# Altium PCB mppt.PcbDoc (part 1 of 6)
Units mm, origin at the board's own origin, x right, y up, seen from the top; angles counter-clockwise.
Board outline 161 x 166 mm, 6 copper layers (Top Layer, Layer 1, Layer 2, Layer 3, Layer 4, Bottom Layer), stack 0.815 mm thick; 460 components, 230 nets, 1421 pads, 2551 vias.
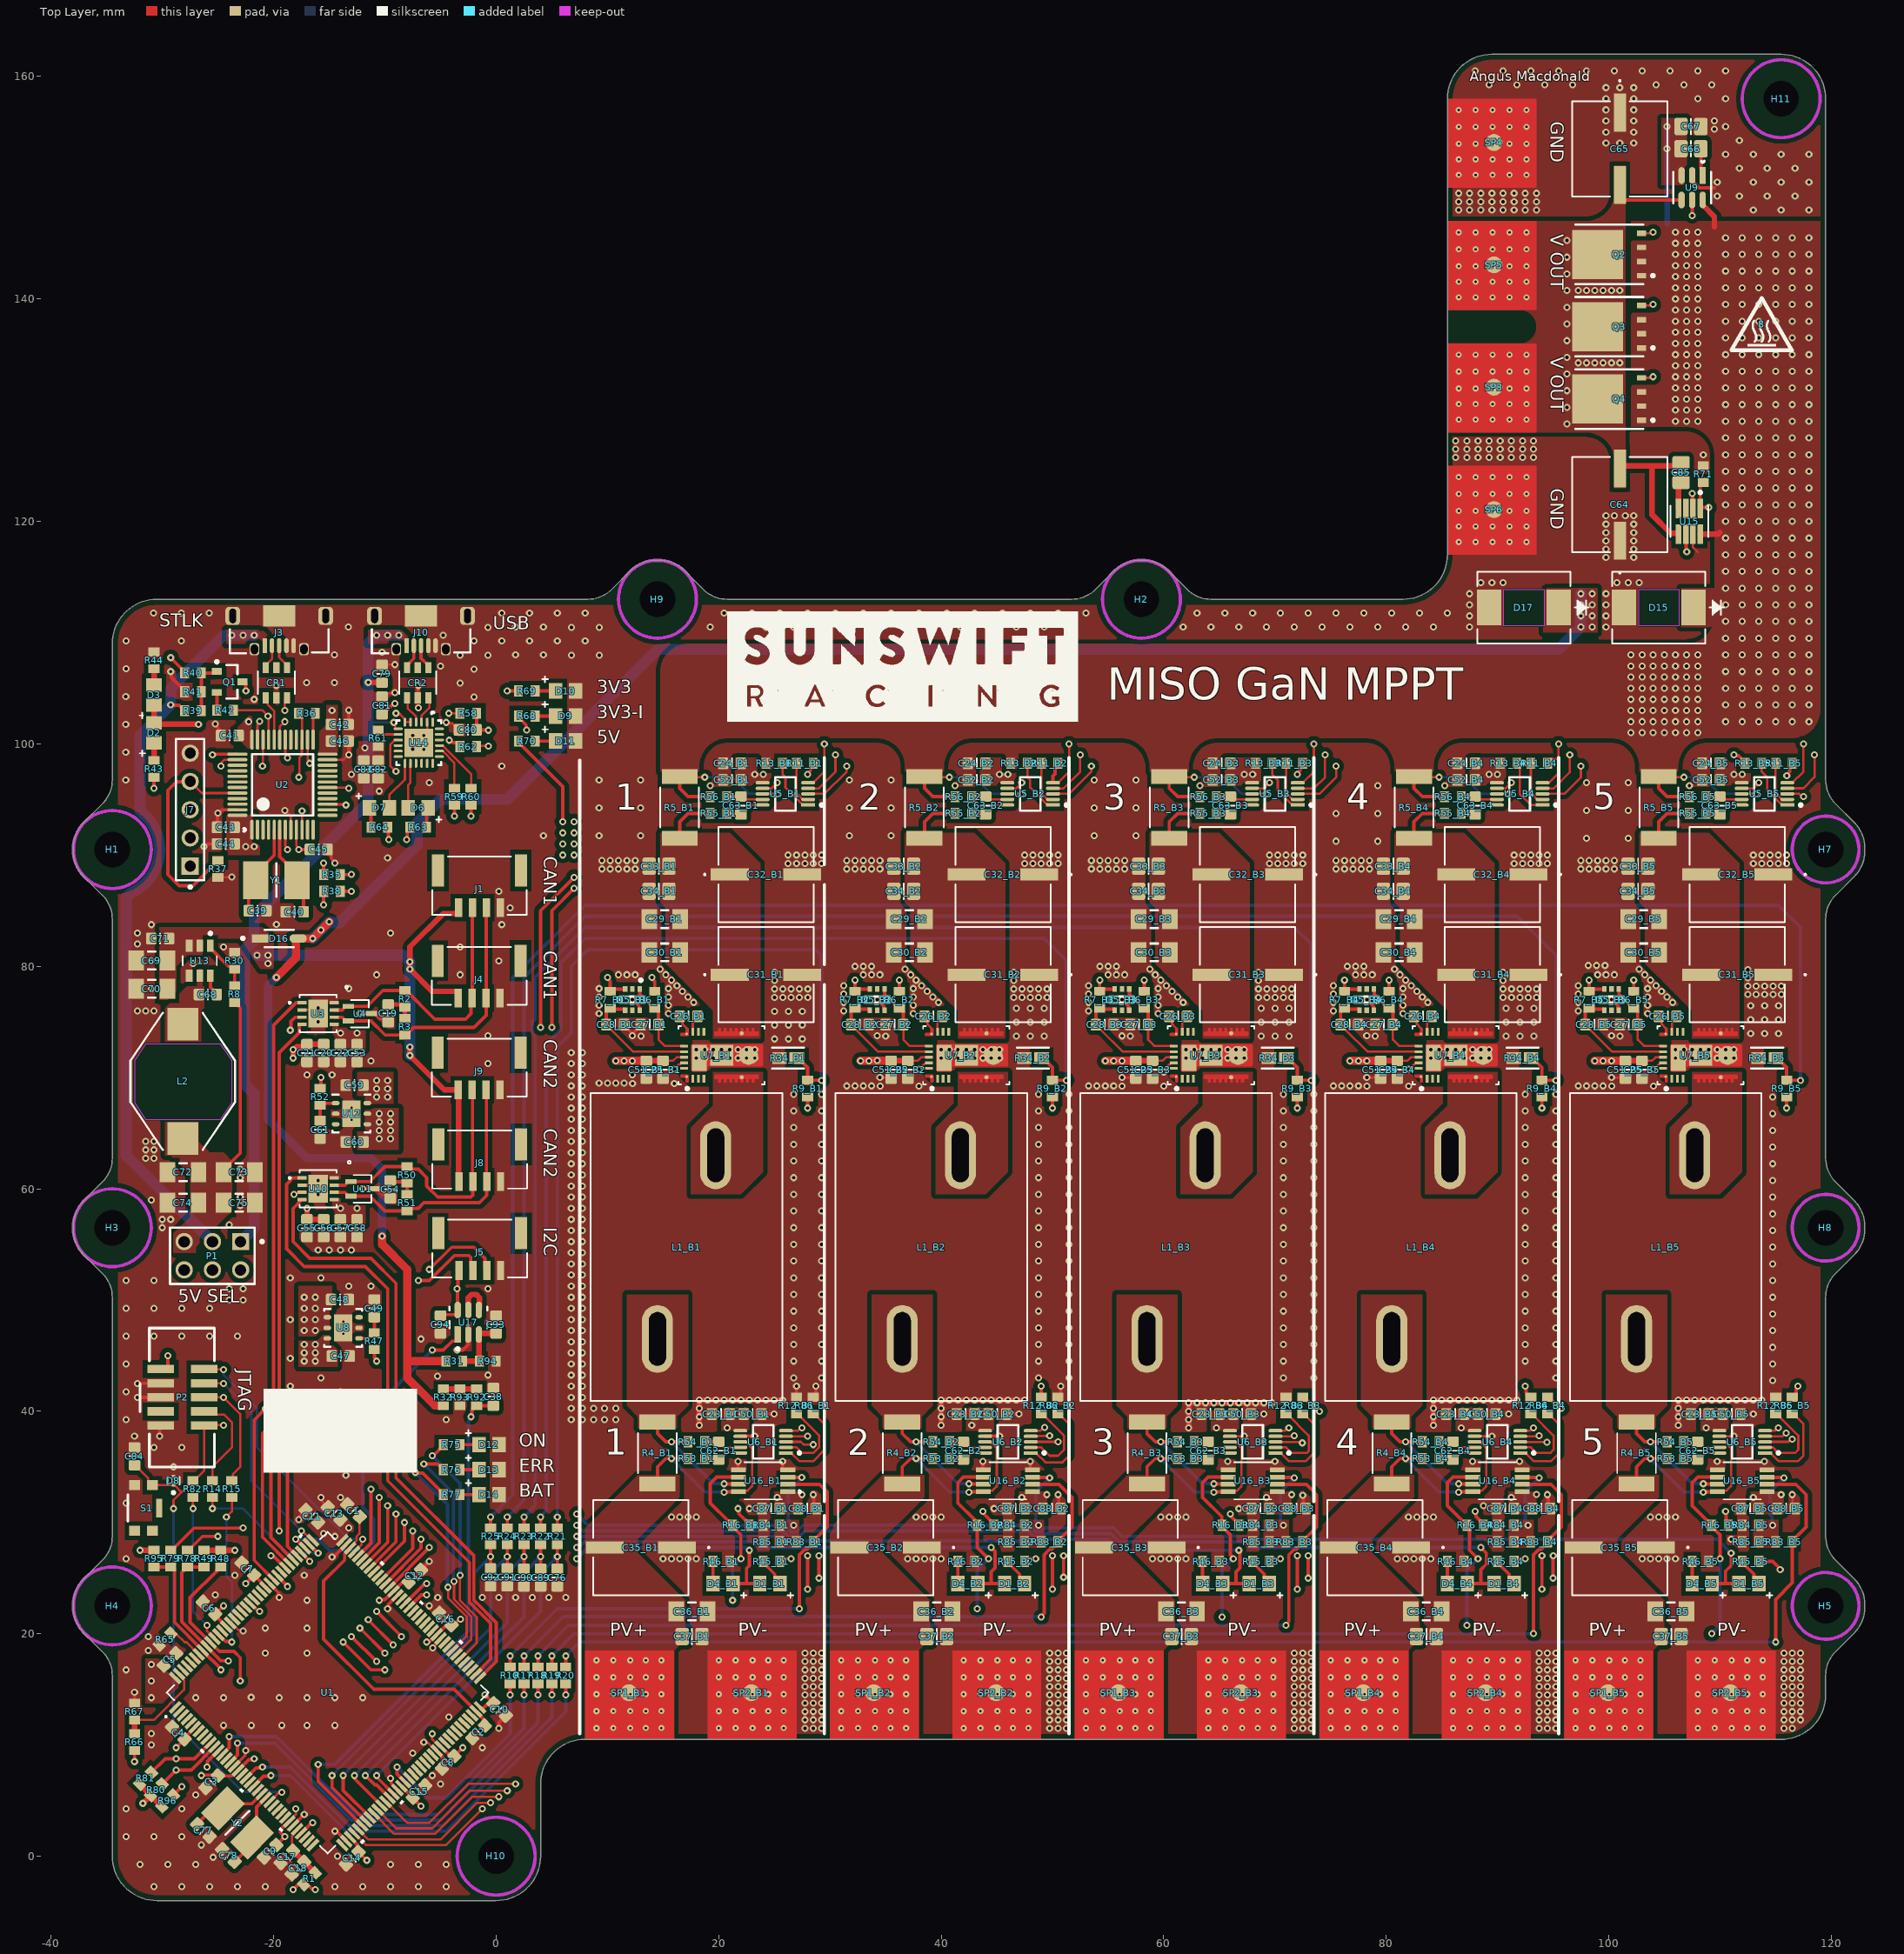
[diagram p0: Top Layer view]
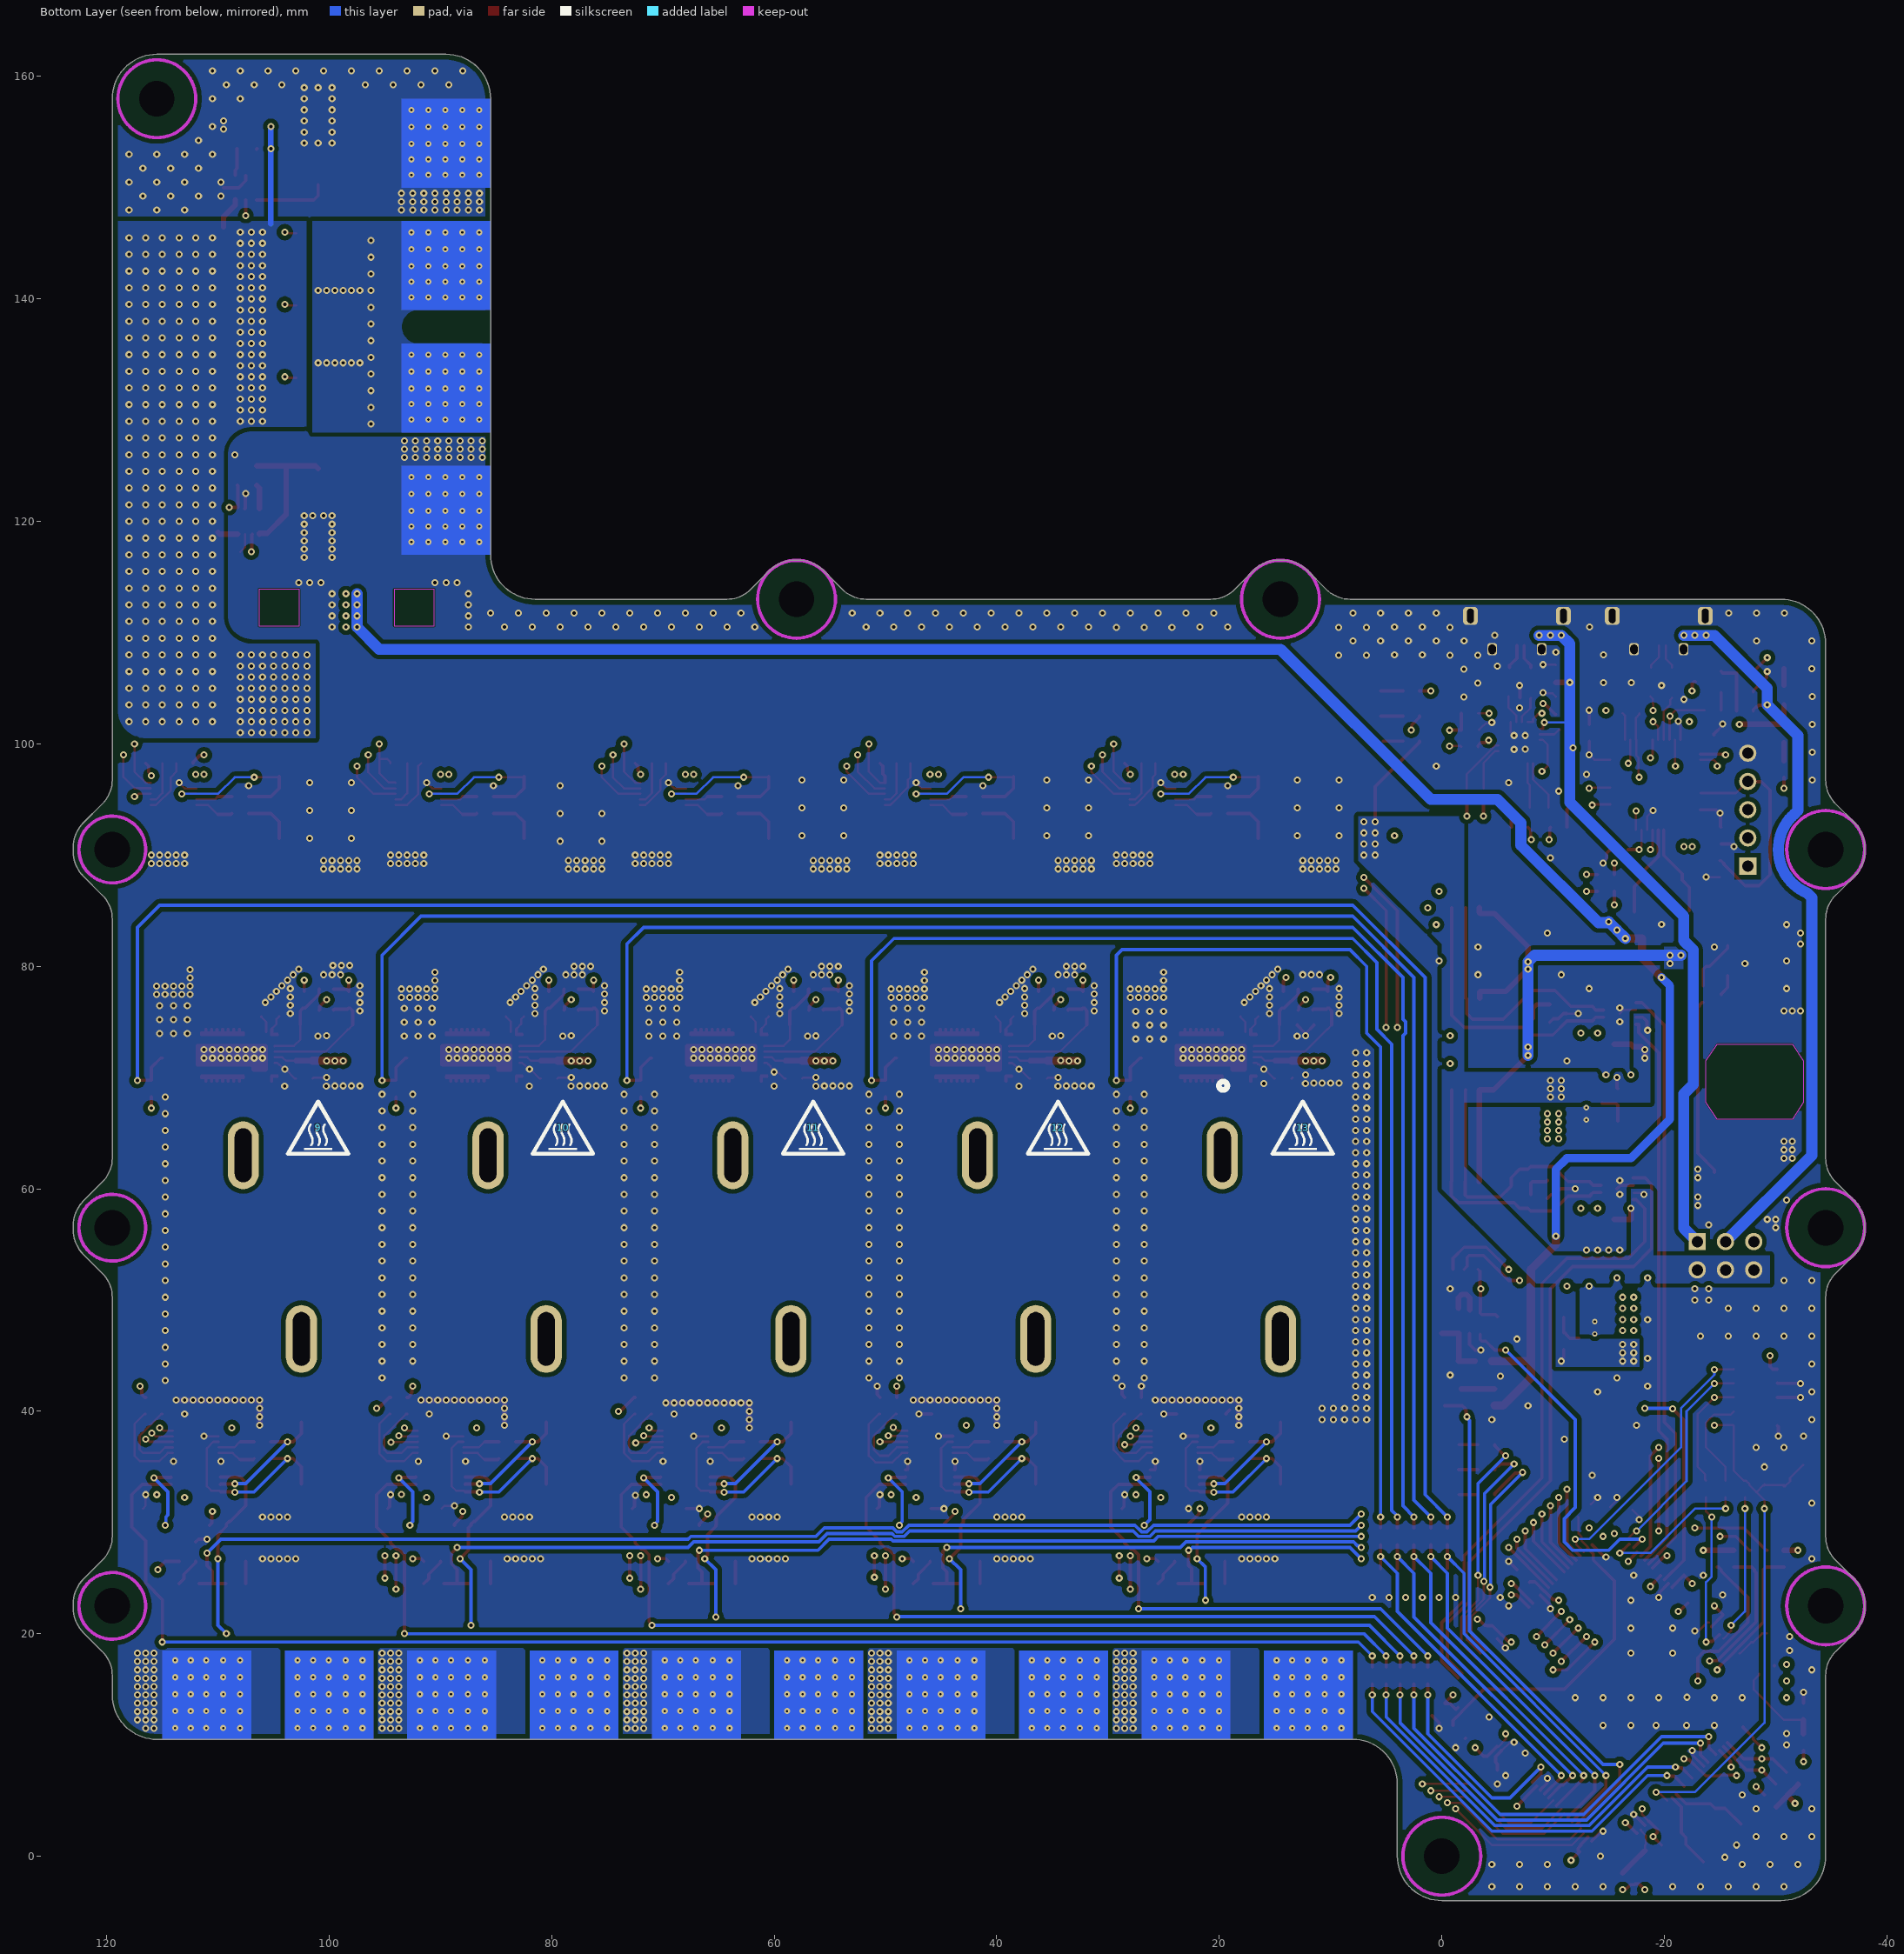
[diagram p1: Bottom Layer view, seen from below]
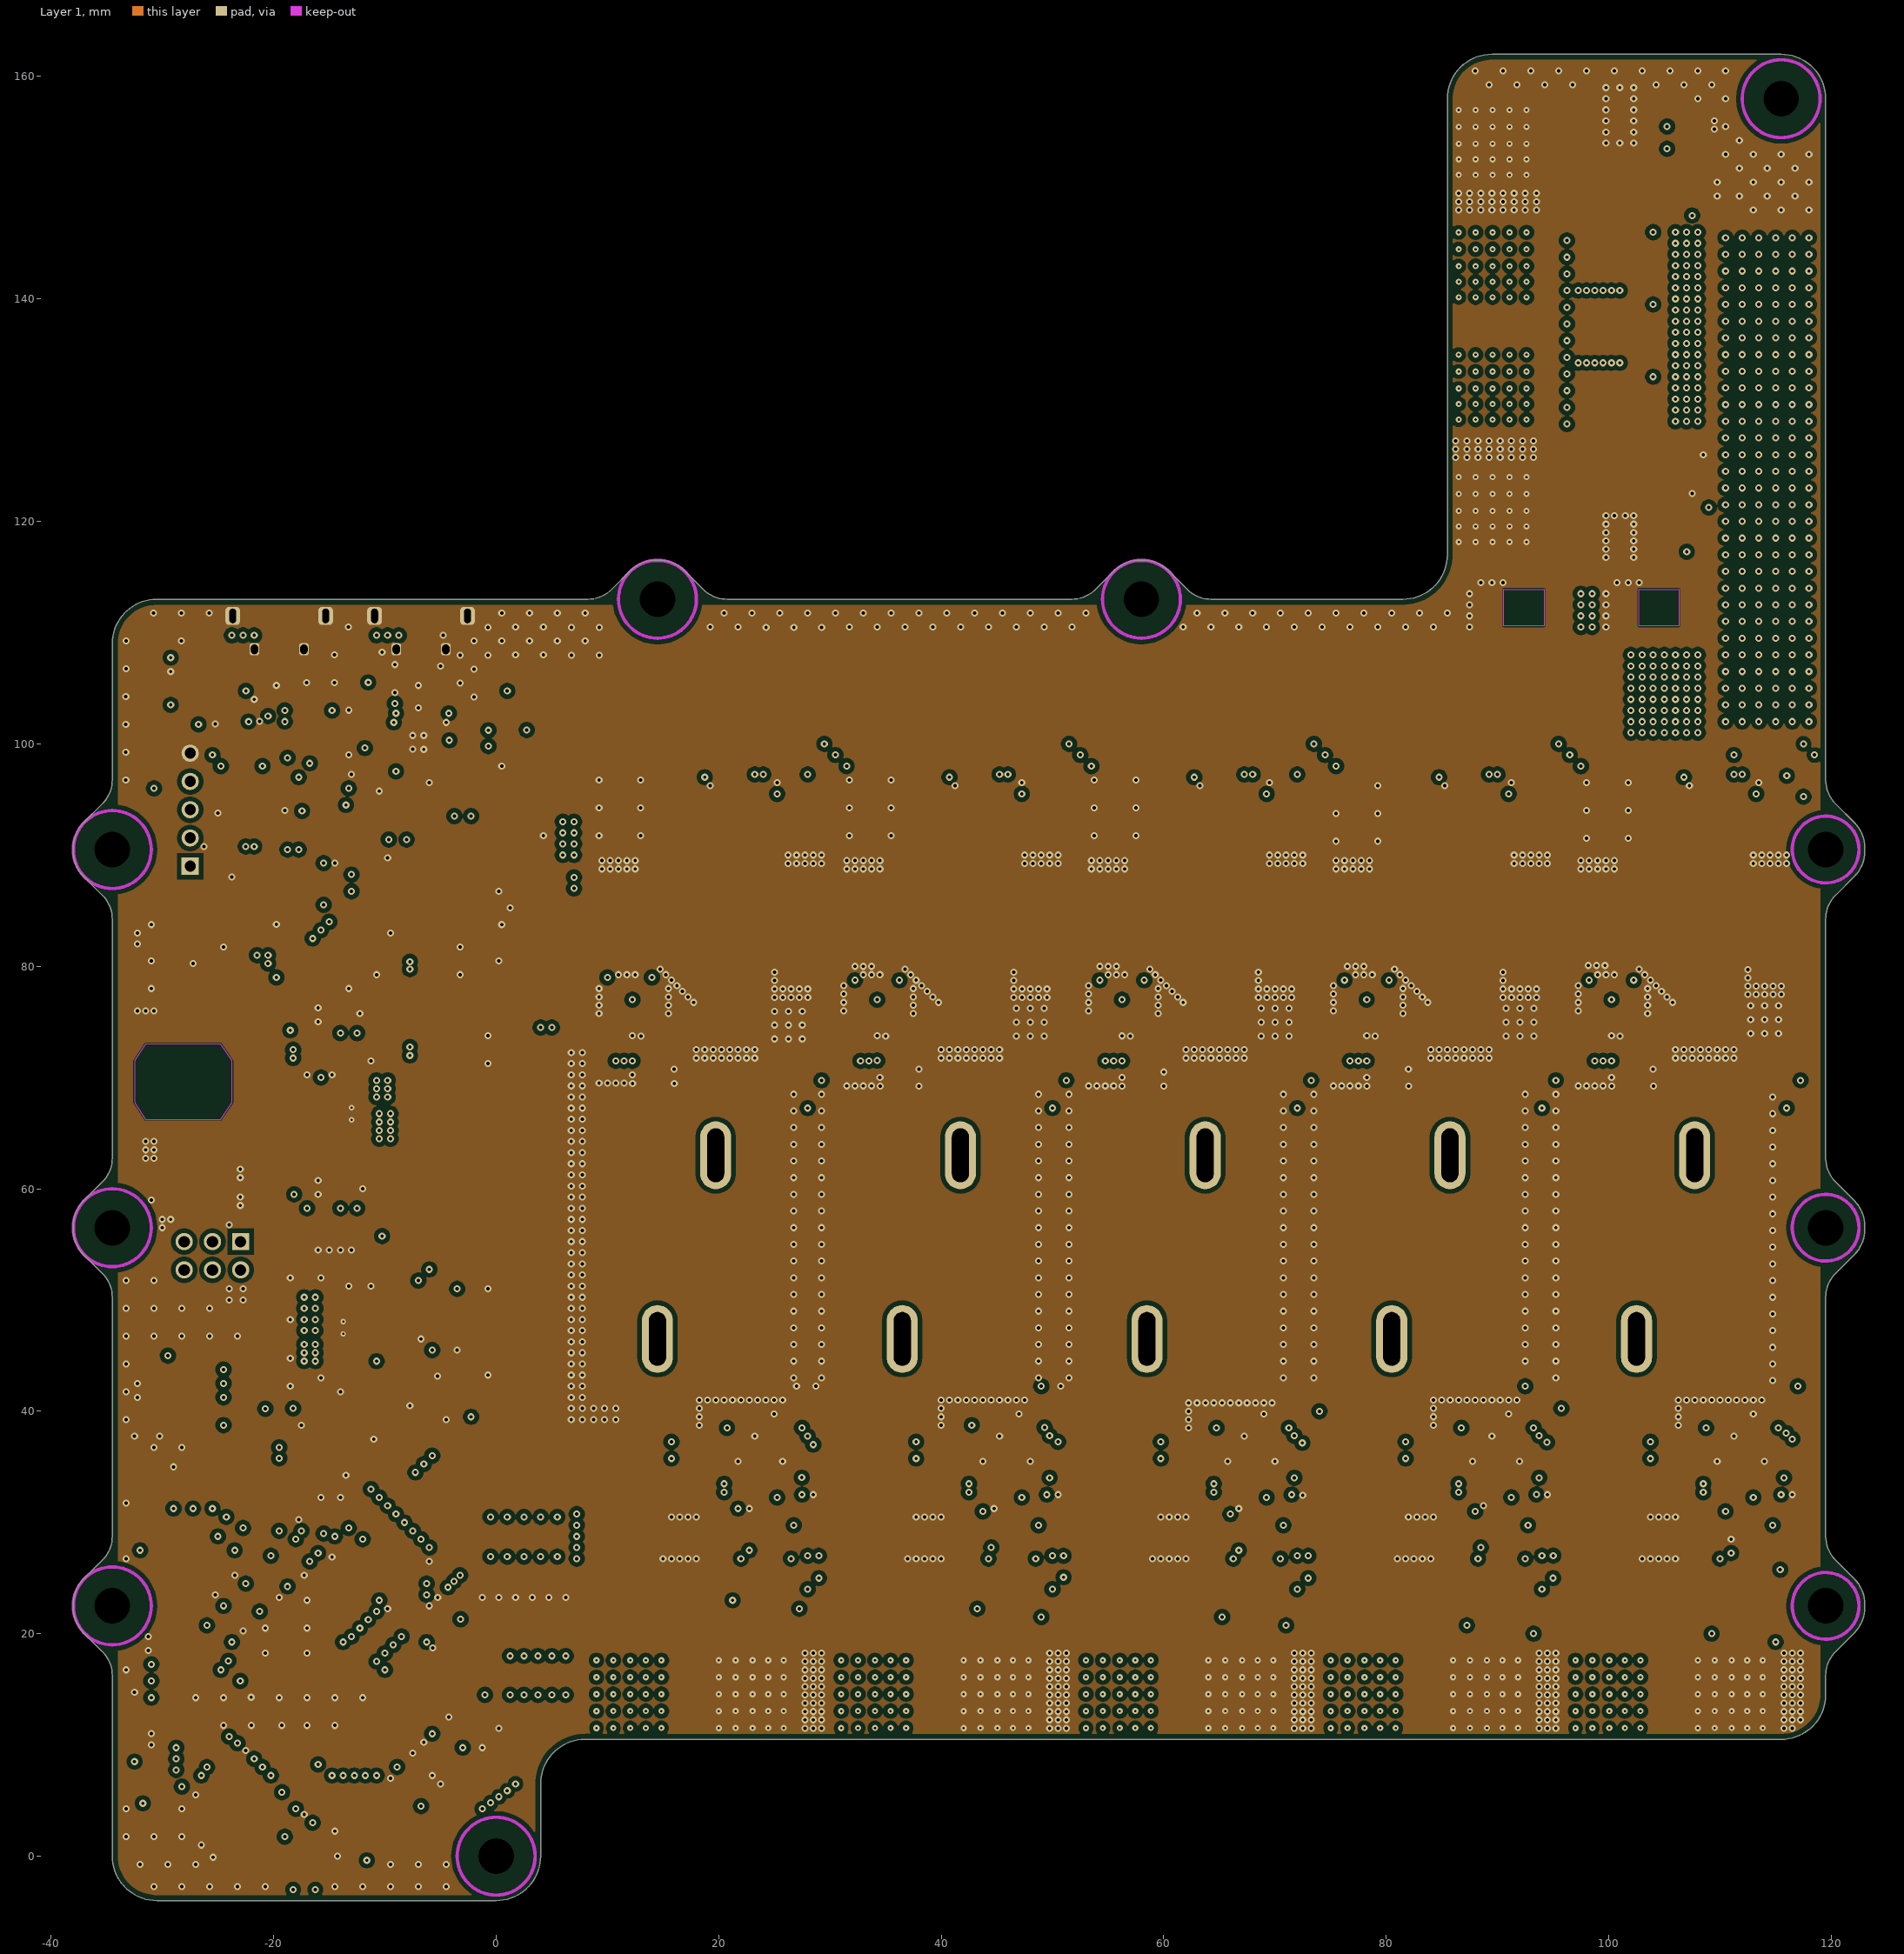
[diagram p2: Layer 1]
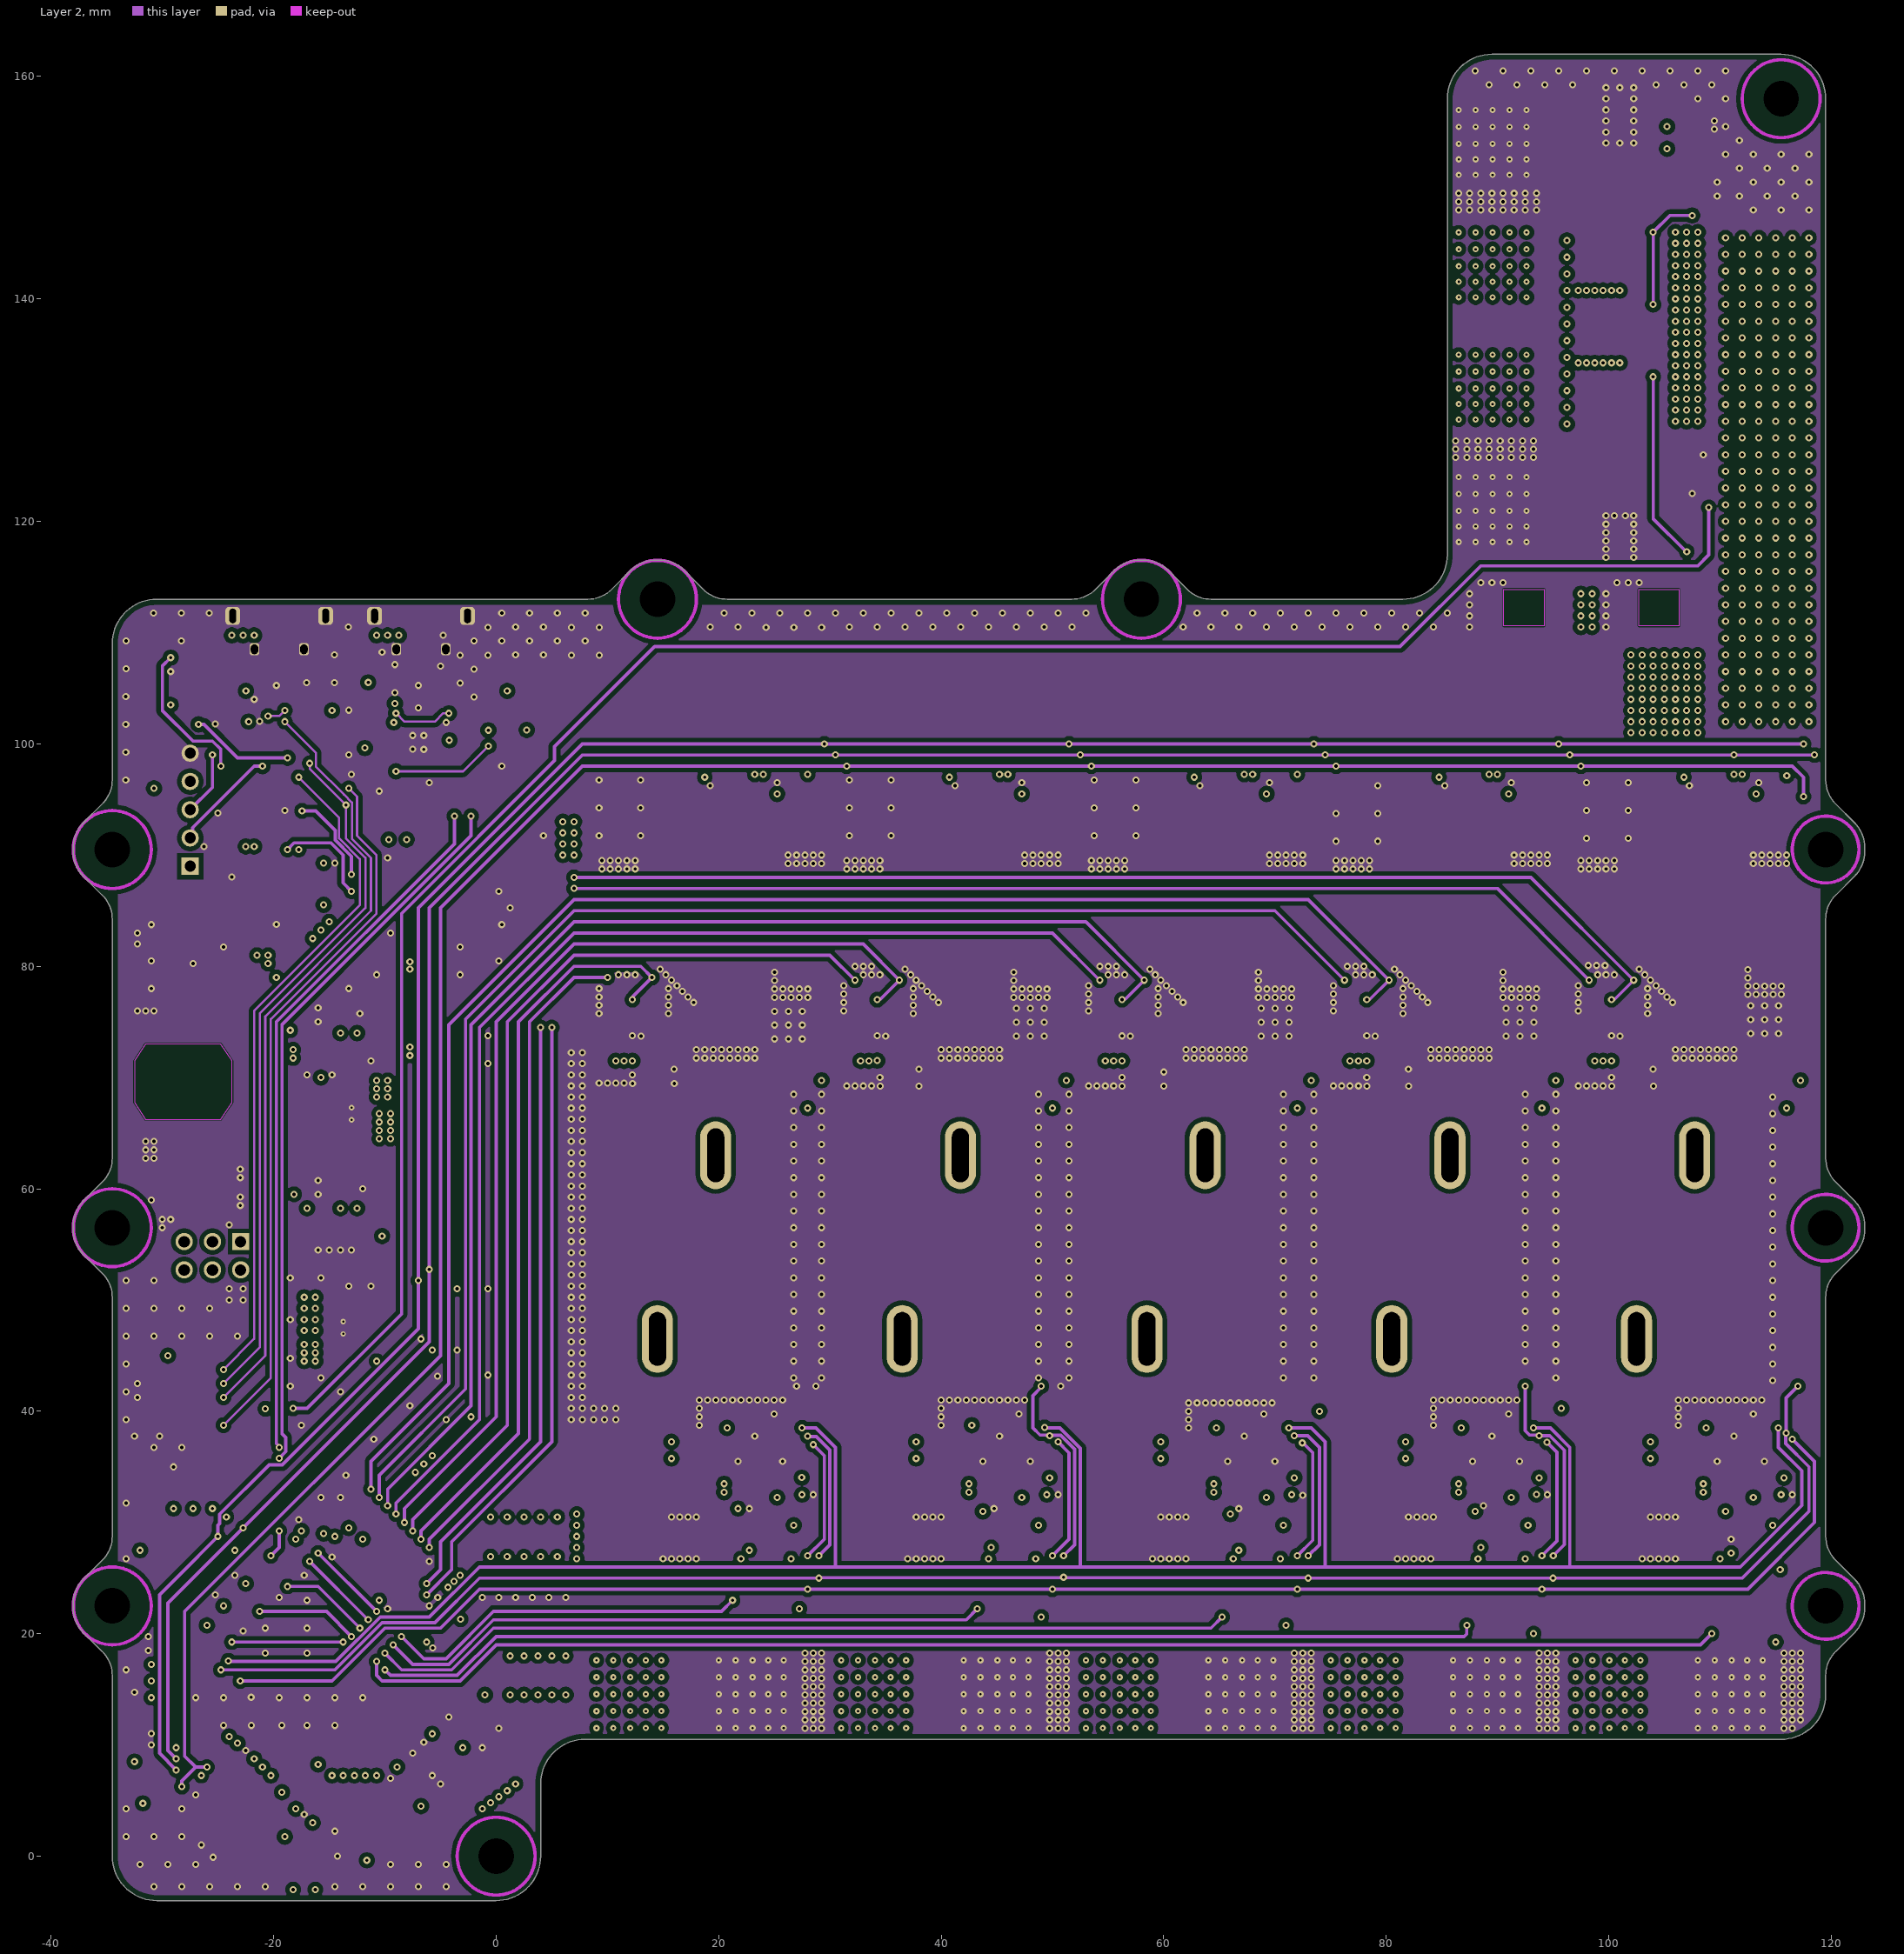
[diagram p3: Layer 2]
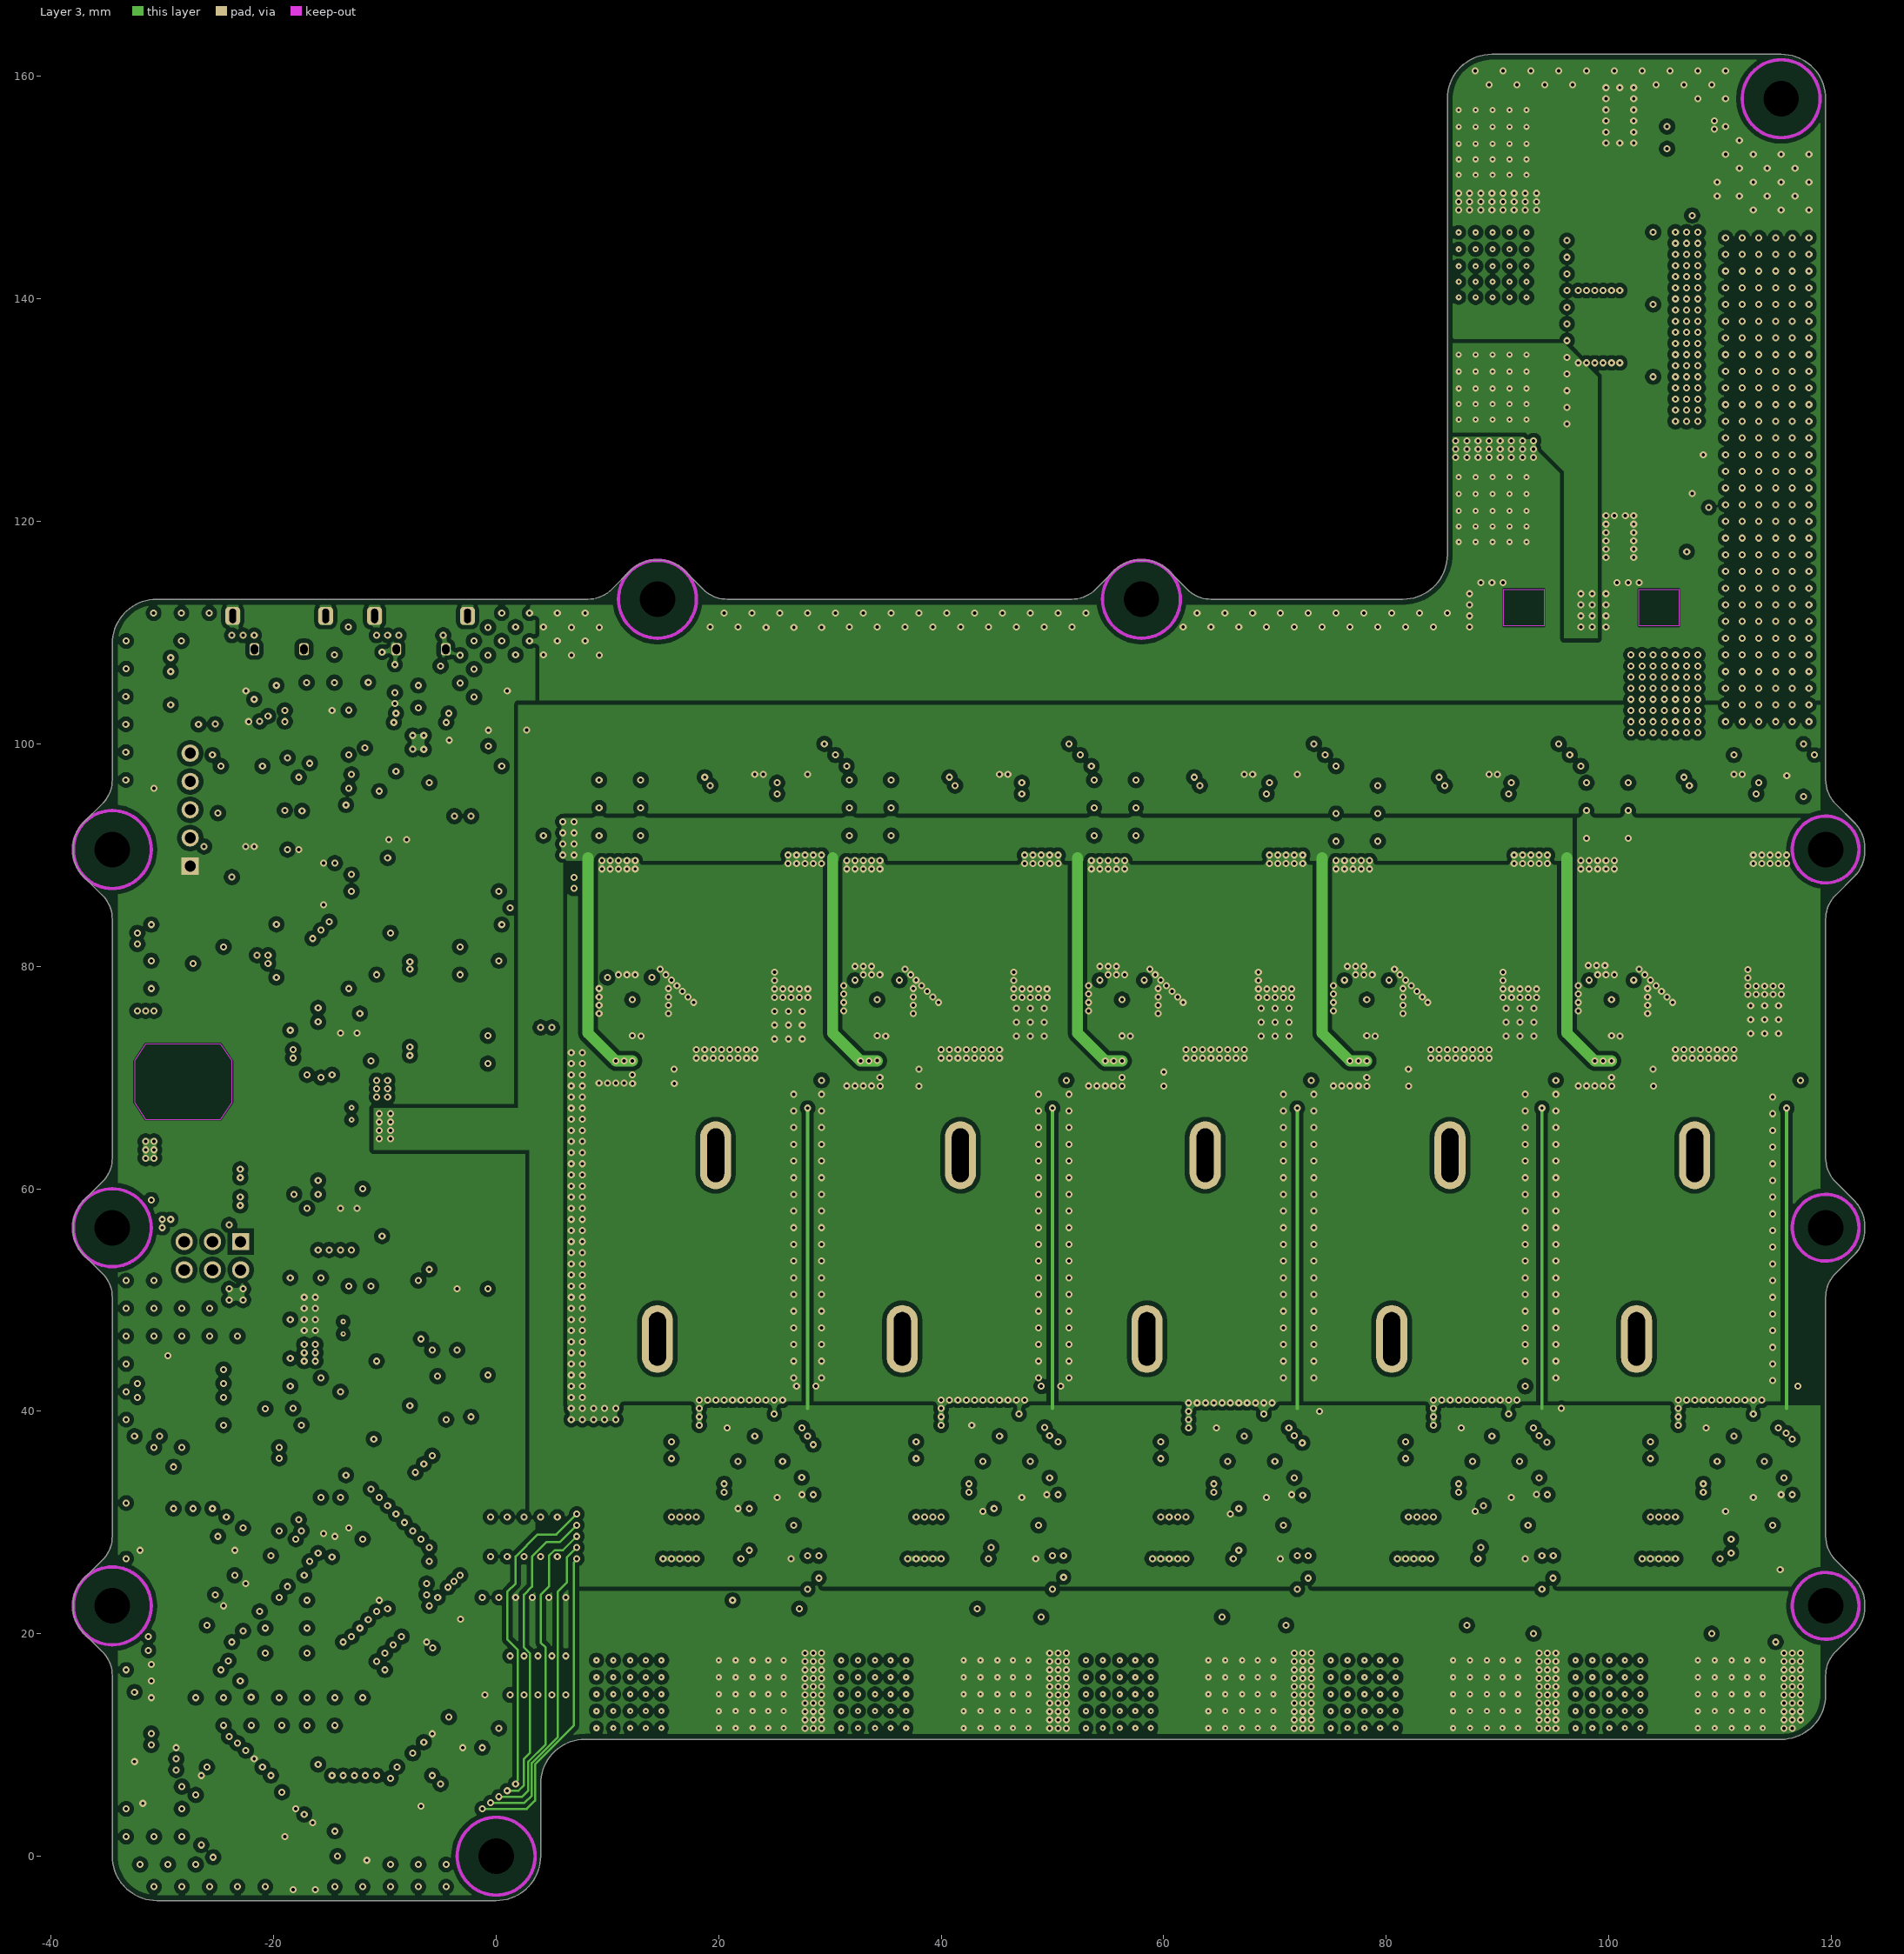
[diagram p4: Layer 3]
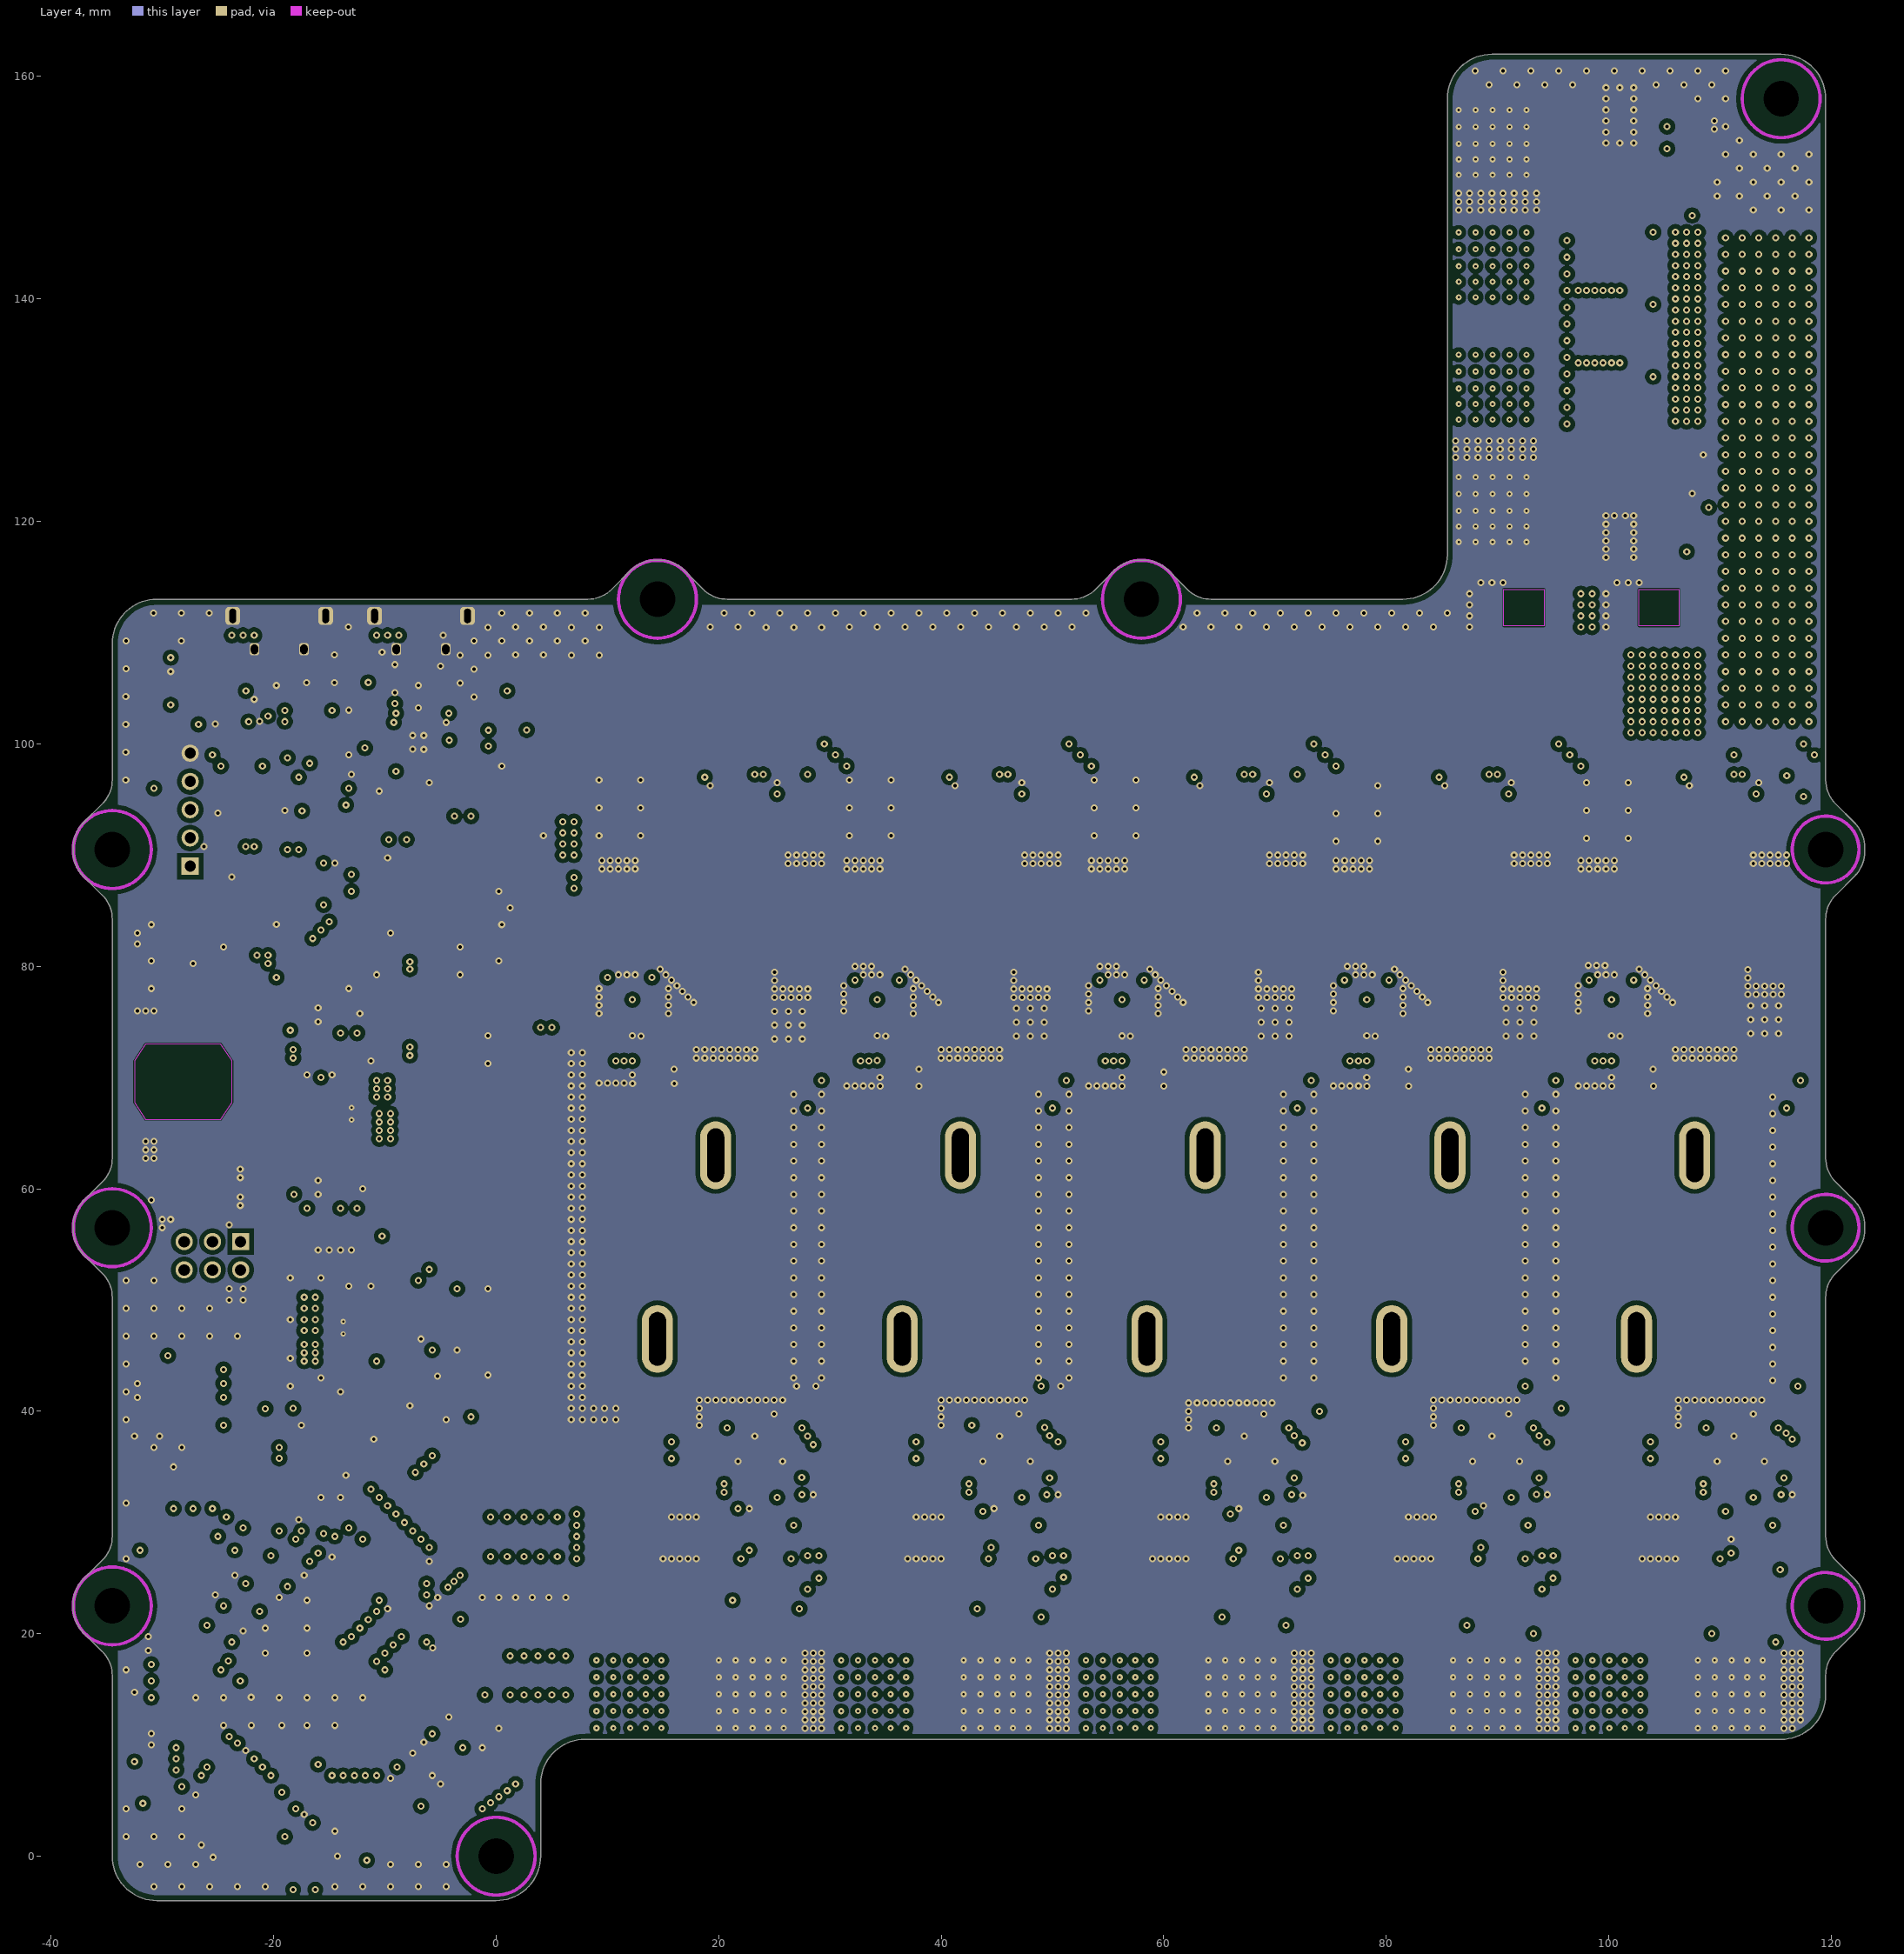
[diagram p5: Layer 4]
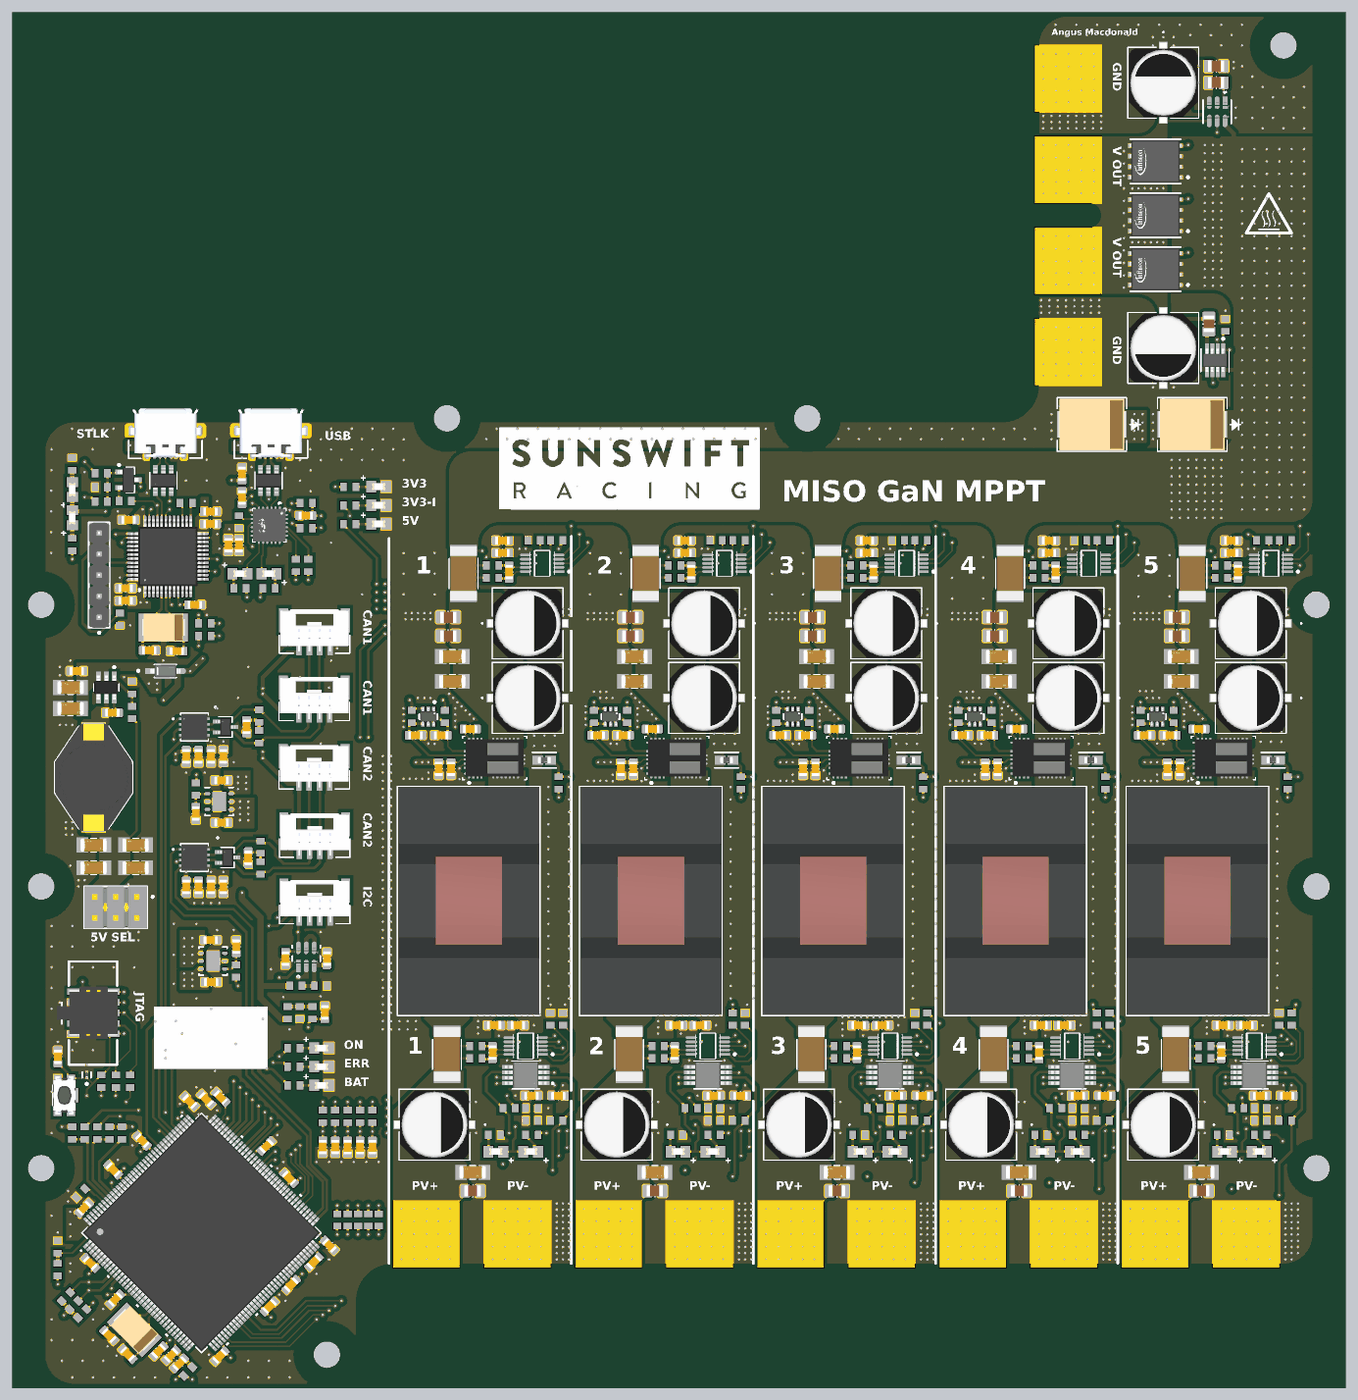
[diagram p10: 3D render of the assembled board from above, using the file's embedded part models]

## Layer stack, top to bottom
Top Solder: solder mask 0.0102, Solder Resist, Dk 3.5
Top Layer: signal copper 0.07
Dielectric 2: prepreg 0.0711, PP-006, Dk 4.1
Layer 1: signal copper 0.0175
Dielectric 4: prepreg 0.0711, PP-006, Dk 4.1
Layer 2: signal copper 0.0175
Dielectric 1: dielectric 0.32, FR-4, Dk 4.8
Layer 3: signal copper 0.0175
Dielectric 5: prepreg 0.0711, PP-006, Dk 4.1
Layer 4: signal copper 0.0175
Dielectric 3: prepreg 0.0711, PP-006, Dk 4.1
Bottom Layer: signal copper 0.07
Bottom Solder: solder mask 0.0102, Solder Resist, Dk 3.5

## Board outline
-37.102,20.102 cw(c-34.934,22.27) -38,22.27 -38,22.73 cw(c-34.934,22.73) -37.102,24.898 -35.398,26.602 ccw(c-37.566,28.77) -34.5,28.77 -34.5,50.23 ccw(c-37.566,50.23) -35.398,52.398 -37.102,54.102 cw(c-34.934,56.27) -38,56.27 -38,56.73 cw(c-34.934,56.73) -37.102,58.898 -35.398,60.602 ccw(c-37.566,62.77) -34.5,62.77 -34.5,84.23 ccw(c-37.566,84.23) -35.398,86.398 -37.102,88.102 cw(c-34.934,90.27) -38,90.27 -38,90.73 cw(c-34.934,90.73) -37.102,92.898 -35.398,94.602 ccw(c-37.566,96.77) -34.5,96.77 -34.5,109 cw(c-30.5,109) -30.5,113 7,113 8.23,113 ccw(c8.23,116.066) 10.398,113.898 12.102,115.602 cw(c14.27,113.434) 14.27,116.5 14.73,116.5 cw(c14.73,113.434) 16.898,115.602 18.602,113.898 ccw(c20.77,116.066) 20.77,113 51.73,113 ccw(c51.73,116.066) 53.898,113.898 55.602,115.602 cw(c57.77,113.434) 57.77,116.5 58.23,116.5 cw(c58.23,113.434) 60.398,115.602 62.102,113.898 ccw(c64.27,116.066) 64.27,113 81.5,113 ccw(c81.5,117) 85.5,117 85.5,158 cw(c89.5,158) 89.5,162 115.5,162 cw(c115.5,158) 119.5,158 119.5,98 119.5,96.77 ccw(c122.566,96.77) 120.398,94.602 122.102,92.898 cw(c119.934,90.73) 123,90.73 123,90.27 cw(c119.934,90.27) 122.102,88.102 120.398,86.398 ccw(c122.566,84.23) 119.5,84.23 119.5,62.77 ccw(c122.566,62.77) 120.398,60.602 122.102,58.898 cw(c119.934,56.73) 123,56.73 123,56.27 cw(c119.934,56.27) 122.102,54.102 120.398,52.398 ccw(c122.566,50.23) 119.5,50.23 119.5,28.77 ccw(c122.566,28.77) 120.398,26.602 122.102,24.898 cw(c119.934,22.73) 123,22.73 123,22.27 cw(c119.934,22.27) 122.102,20.102 120.398,18.398 ccw(c122.566,16.23) 119.5,16.23 119.5,14.5 cw(c115.5,14.5) 115.5,10.5 8,10.5 ccw(c8,6.5) 4,6.5 4,0 cw(c0,0) 0,-4 -30.5,-4 cw(c-30.5,0) -34.5,0 -34.5,16.23 ccw(c-37.566,16.23) -35.398,18.398

## Design rules (kind name [scope] priority, off if disabled: settings)
Clearance [InNetClass('All Nets')] p1: gap=0.102 ignorepadtopadclearanceinfootprint=FALSE except(0.127: Arc-Via Track-Via SMDPad-Via THPad-Via Via-Via Via-Fill Via-Region Via-Text; 0.4: Arc-Poly Track-Poly SMDPad-Poly THPad-Poly Via-Poly Fill-Poly Poly-Poly)
Clearance ClearanceMidLayer1 [OnLayer('Mid Layer 1') Or IsVia Or IsThruPin vs OnLayer('Mid Layer 1')] p2: gap=0.102 ignorepadtopadclearanceinfootprint=FALSE except(0.127: Arc-Via Track-Via SMDPad-Via THPad-Via Via-Via Via-Fill Via-Poly Via-Region Via-Text)
Clearance ClearanceTopLayer [OnLayer('Top Layer') Or IsVia Or IsThruPin vs OnLayer('Top Layer') Or IsVia Or IsThruPin] p3: gap=0.203 ignorepadtopadclearanceinfootprint=TRUE except(0.102: Arc-Hole Track-Hole SMDPad-Hole THPad-Hole Via-Hole Fill-Hole Poly-Hole Region-Hole Text-Hole)
Clearance ClearanceBottomLayer [OnLayer('Bottom Layer') Or IsVia Or IsThruPin vs OnLayer('Bottom Layer') Or IsVia Or IsThruPin] p4: gap=0.203 ignorepadtopadclearanceinfootprint=FALSE except(0.102: Arc-Hole Track-Hole SMDPad-Hole THPad-Hole Via-Hole Fill-Hole Poly-Hole Region-Hole Text-Hole)
Clearance ClearanceMidLayer2 [OnLayer('Mid Layer 2') Or IsVia Or IsThruPin vs OnLayer('Mid Layer 2')] p5: gap=0.102 ignorepadtopadclearanceinfootprint=FALSE except(0.127: Arc-Via Track-Via SMDPad-Via THPad-Via Via-Via Via-Fill Via-Poly Via-Region Via-Text)
HoleSize [All] p1: absolutevalues=TRUE maxlimit=25.4 minlimit=0.025 maxpercent=80.000 minpercent=20.000
MinimumSolderMaskSliver [All] p1: minsoldermaskwidth=0
PolygonConnect [All] p1: connectstyle=Direct reliefconductorwidth=0.254 reliefentries=4 polygonreliefangle="90 Angle" airgapwidth=0.254
RoomDefinition B2 [InComponentClass('B2')] p1: confinementstyle=ConfineIn formatcopy=TRUE lockcomponents=FALSE outline 27,10 52,10 52,99.5 27,99.5
RoomDefinition B1 [InComponentClass('B1')] p2: confinementstyle=ConfineIn formatcopy=TRUE lockcomponents=FALSE outline 5,10 30,10 30,99.5 5,99.5
RoomDefinition B5 [InComponentClass('B5')] p3: confinementstyle=ConfineIn formatcopy=TRUE lockcomponents=FALSE outline 93,10 118,10 118,99.5 93,99.5
RoomDefinition B4 [InComponentClass('B4')] p4: confinementstyle=ConfineIn formatcopy=TRUE lockcomponents=FALSE outline 71,10 96,10 96,99.5 71,99.5
RoomDefinition B3 [InComponentClass('B3')] p5: confinementstyle=ConfineIn formatcopy=TRUE lockcomponents=FALSE outline 49,10 74,10 74,99.5 49,99.5
RoutingVias [All] p1: holewidth=0.2 width=0.45 viastyle="Through Hole" minholewidth=0.2 minwidth=0.45 maxholewidth=6.3 maxwidth=6.55
SilkToSolderMaskClearance [IsPad] p1: minsilkscreentomaskgap=0.203 clearancetoexposedcopper=TRUE
SolderMaskExpansion [All] p1: expansion=0.102 istentingtop=FALSE
SupplyNets "Schematic Supply Nets_10" [InNet('GND')] p1: voltage=0.000
SupplyNets "Schematic Supply Nets_1" [InNet('3V3_INA')] p2: voltage=0.000
SupplyNets "Schematic Supply Nets_8" [InNet('V_BAT')] p3: voltage=0.000
SupplyNets "Schematic Supply Nets_7" [InNet('5V_USB')] p4: voltage=0.000
SupplyNets "Schematic Supply Nets_6" [InNet('V_PV')] p5: voltage=0.000
SupplyNets "Schematic Supply Nets_5" [InNet('V_BUS')] p6: voltage=0.000
SupplyNets "Schematic Supply Nets_4" [InNet('5V_STLINK')] p7: voltage=0.000
SupplyNets "Schematic Supply Nets_2" [InNet('VREF_P')] p8: voltage=0.000
SupplyNets "Schematic Supply Nets" [InNet('5V_REG')] p9: voltage=0.000
SupplyNets "Schematic Supply Nets_3" [InNet('3V3')] p10: voltage=0.000
SupplyNets "Schematic Supply Nets_9" [InNet('5V')] p11: voltage=0.000
Width [All] p1: maxlimit=1816.048 minlimit=0.102 preferedwidth=0.102 toplayer_minwidth=0.203 toplayer_prefwidth=0.203 bottomlayer_minwidth=0.203 bottomlayer_prefwidth=0.203 minimp=50.000000 maximp=50.000000 favimp=50.000000
27 further rules are at their usual default settings.

## Classes and differential pairs
channel class boost_stage_HP: B1 B2 B3 B4 B5
component class U_st_link: C39 C40 C41 C42 C43 C44 C45 C46 CR1 D2 D3 J3 J7 Q1 R35 R36 R37 R38 R39 R40 R41 R42 R43 R44 U2 Y1
component class U_microcontroller: C1 C2 C3 C4 C5 C6 C7 C8 C9 C10 C11 C12 C13 C14 C15 C16 C17 C18 C38 C76 C77 C78 C84 C89 C90 C91 C92 C93 C94 D8 D12 D13 D14 J5 P2 R1 R10 R14 R15 R17 R18 R19 R20 R21 R22 R23 R24 R25 R31 R32 R48 R49 R65 R66 R67 R75 R76 R77 R78 R79 R80 R81 R82 R92 R93 R94 R95 R96 S1 U1 U17 Y2
component class U_auxilliary: C19 C20 C21 C22 C47 C48 C49 C53 C54 C55 C56 C57 C58 C59 C60 C61 C68 C69 C70 C71 C72 C73 C74 C75 C79 C80 C81 C82 C83 CR2 D6 D7 D9 D10 D11 J1 J4 J8 J9 J10 L2 P1 R2 R3 R8 R30 R47 R50 R51 R52 R58 R59 R60 R61 R62 R63 R64 R68 R69 R70 U3 U4 U8 U10 U11 U12 U13 U14
component class top_level: C64 C65 C66 C67 C85 D15 D16 D17 H1 H2 H3 H4 H5 H7 H8 H9 H10 H11 Q2 Q3 Q4 R71 SP3 SP4 SP5 SP6 U9 U15
component class B5: C23_B5 C24_B5 C25_B5 C26_B5 C27_B5 C28_B5 C29_B5 C30_B5 C31_B5 C32_B5 C33_B5 C34_B5 C35_B5 C36_B5 C37_B5 C50_B5 C51_B5 C52_B5 C62_B5 C63_B5 C87_B5 C88_B5 D1_B5 D4_B5 D5_B5 L1_B5 R4_B5 R5_B5 R6_B5 R7_B5 R9_B5 R11_B5 R12_B5 R13_B5 R16_B5 R34_B5 R45_B5 R46_B5 R53_B5 R54_B5 R55_B5 R56_B5 R83_B5 R84_B5 R85_B5 R86_B5 SP1_B5 SP2_B5 U5_B5 U6_B5 U7_B5 U16_B5
component class B4: C23_B4 C24_B4 C25_B4 C26_B4 C27_B4 C28_B4 C29_B4 C30_B4 C31_B4 C32_B4 C33_B4 C34_B4 C35_B4 C36_B4 C37_B4 C50_B4 C51_B4 C52_B4 C62_B4 C63_B4 C87_B4 C88_B4 D1_B4 D4_B4 D5_B4 R4_B4 R5_B4 R6_B4 R7_B4 R9_B4 R11_B4 R12_B4 R13_B4 R16_B4 R34_B4 R45_B4 R46_B4 R53_B4 R54_B4 R55_B4 R56_B4 R83_B4 R84_B4 R85_B4 R86_B4 SP1_B4 SP2_B4 U5_B4 U6_B4 U7_B4 U16_B4
component class B3: C23_B3 C24_B3 C25_B3 C26_B3 C27_B3 C28_B3 C29_B3 C30_B3 C31_B3 C32_B3 C33_B3 C34_B3 C35_B3 C36_B3 C37_B3 C50_B3 C51_B3 C52_B3 C62_B3 C63_B3 C87_B3 C88_B3 D1_B3 D4_B3 D5_B3 L1_B3 R4_B3 R5_B3 R6_B3 R7_B3 R9_B3 R11_B3 R12_B3 R13_B3 R16_B3 R34_B3 R45_B3 R46_B3 R53_B3 R54_B3 R55_B3 R56_B3 R83_B3 R84_B3 R85_B3 R86_B3 SP1_B3 SP2_B3 U5_B3 U6_B3 U7_B3 U16_B3
component class B2: C23_B2 C24_B2 C25_B2 C26_B2 C27_B2 C28_B2 C29_B2 C30_B2 C31_B2 C32_B2 C33_B2 C34_B2 C35_B2 C36_B2 C37_B2 C50_B2 C51_B2 C52_B2 C62_B2 C63_B2 C87_B2 C88_B2 D1_B2 D4_B2 D5_B2 L1_B2 R4_B2 R5_B2 R6_B2 R7_B2 R9_B2 R11_B2 R12_B2 R13_B2 R16_B2 R34_B2 R45_B2 R46_B2 R53_B2 R54_B2 R55_B2 R56_B2 R83_B2 R84_B2 R85_B2 R86_B2 SP1_B2 SP2_B2 U5_B2 U6_B2 U7_B2 U16_B2
component class B1: C23_B1 C24_B1 C25_B1 C26_B1 C27_B1 C28_B1 C29_B1 C30_B1 C31_B1 C32_B1 C33_B1 C34_B1 C35_B1 C36_B1 C37_B1 C50_B1 C51_B1 C52_B1 C62_B1 C63_B1 C87_B1 C88_B1 D1_B1 D4_B1 D5_B1 L1_B1 R4_B1 R5_B1 R6_B1 R7_B1 R9_B1 R11_B1 R12_B1 R13_B1 R16_B1 R34_B1 R45_B1 R46_B1 R53_B1 R54_B1 R55_B1 R56_B1 R83_B1 R84_B1 R85_B1 R86_B1 SP1_B1 SP2_B1 U5_B1 U6_B1 U7_B1 U16_B1

## Components (designator, comment, footprint, x,y, rotation, side; value= is the part's Value field where it differs from the comment)
8 "CAUTION HOT SURFACE" IEC_HotSurface_Small 113.75,137.75 r0 top
9 "CAUTION HOT SURFACE" IEC_HotSurface_Small 101,65.5 r180 bottom (schematic designator 8)
10 "CAUTION HOT SURFACE" IEC_HotSurface_Small 79,65.5 r180 bottom (schematic designator 8)
11 "CAUTION HOT SURFACE" IEC_HotSurface_Small 56.5,65.5 r180 bottom (schematic designator 8)
12 "CAUTION HOT SURFACE" IEC_HotSurface_Small 34.5,65.5 r180 bottom (schematic designator 8)
13 "CAUTION HOT SURFACE" IEC_HotSurface_Small 12.5,65.5 r180 bottom (schematic designator 8)
C1 "CC0603KRX7R5BB225" C0603 -12.241,30.491 r135 top value=2.2µF
C2 "CC0603KRX7R5BB225" C0603 -1,11.75 r225 top value=2.2µF
C3 "CC0603MRX7R5BB475" C0603 -26.14,6.11 r45 top value=4.7µF
C4 "CC0603KRX7R7BB105" C0603 -29.14,11.64 r315 top value=1µF
C5 "CC0603KRX7R7BB105" C0603 -28.741,18.259 r225 top value=1µF
C6 "CC0603KRX7R8BB104" C0603 -26.39,22.89 r315 top value=100nF
C7 "CC0603KRX7R8BB104" C0603 -22.89,26.39 r315 top value=100nF
C8 "CC0603KRX7R8BB104" C0603 -4.89,7.86 r45 top value=100nF
C9 "CC0603KRX7R8BB104" C0603 -20.89,-0.14 r45 top value=100nF
C10 "CC0603KRX7R8BB104" C0603 0.89,12.61 r135 top value=100nF
C11 "CC0603KRX7R8BB104" C0603 -17.14,31.14 r315 top value=100nF
C12 "CC0603KRX7R8BB104" C0603 -6.741,25.759 r225 top value=100nF
C13 "CC0603KRX7R8BB104" C0603 -15.14,31.39 r315 top value=100nF
C14 "CC0603KRX7R8BB104" C0603 -13.509,-0.759 r45 top value=100nF
C15 "CC0603KRX7R8BB104" C0603 -6.36,6.39 r225 top value=100nF
C16 "CC0603KRX7R8BB104" C0603 -5.14,21.89 r315 top value=100nF
C17 "CC0603KRX7R7BB105" C0603 -19.39,-0.64 r45 top value=1µF
C18 "CC0603KRX7R8BB104" C0603 -18.39,-1.64 r45 top value=100nF
C19 "CC0603KRX7R8BB104" C0603 -9.698,74.962 r90 top value=100nF
C20 "CC0603KRX7R7BB105" C0603 -15.5,71.387 r90 top value=1µF
C21 "CC0603KRX7R8BB104" C0603 -17,71.387 r90 top value=100nF
C22 "CC0603KRX7R7BB105" C0603 -14,71.387 r90 top value=1µF
C23_B1 "CC0603KRX7R8BB104" C0603 19.387,39.75 r0 top value=100nF (schematic designator C23)
C23_B2 "CC0603KRX7R8BB104" C0603 41.387,39.75 r0 top value=100nF (schematic designator C23)
C23_B3 "CC0603KRX7R8BB104" C0603 63.387,39.75 r0 top value=100nF (schematic designator C23)
C23_B4 "CC0603KRX7R8BB104" C0603 85.387,39.75 r0 top value=100nF (schematic designator C23)
C23_B5 "CC0603KRX7R8BB104" C0603 107.387,39.75 r0 top value=100nF (schematic designator C23)
C24_B1 "CC0603KRX7R8BB104" C0603 20.387,98.25 r0 top value=100nF (schematic designator C24)
C24_B2 "CC0603KRX7R8BB104" C0603 42.387,98.25 r0 top value=100nF (schematic designator C24)
C24_B3 "CC0603KRX7R8BB104" C0603 64.387,98.25 r0 top value=100nF (schematic designator C24)
C24_B4 "CC0603KRX7R8BB104" C0603 86.387,98.25 r0 top value=100nF (schematic designator C24)
C24_B5 "CC0603KRX7R8BB104" C0603 108.387,98.25 r0 top value=100nF (schematic designator C24)
C25_B1 "CC0603KRX7R8BB104" C0603 15,69.887 r90 top value=100nF (schematic designator C25)
C25_B2 "CC0603KRX7R8BB104" C0603 37,69.887 r90 top value=100nF (schematic designator C25)
C25_B3 "CC0603KRX7R8BB104" C0603 59,69.887 r90 top value=100nF (schematic designator C25)
C25_B4 "CC0603KRX7R8BB104" C0603 81,69.887 r90 top value=100nF (schematic designator C25)
C25_B5 "CC0603KRX7R8BB104" C0603 103,69.887 r90 top value=100nF (schematic designator C25)
C26_B1 "CC0603KRX7R8BB104" C0603 16.487,75.5 r0 top value=100nF (schematic designator C26)
C26_B2 "CC0603KRX7R8BB104" C0603 38.487,75.5 r0 top value=100nF (schematic designator C26)
C26_B3 "CC0603KRX7R8BB104" C0603 60.487,75.5 r0 top value=100nF (schematic designator C26)
C26_B4 "CC0603KRX7R8BB104" C0603 82.487,75.5 r0 top value=100nF (schematic designator C26)
C26_B5 "CC0603KRX7R8BB104" C0603 104.487,75.5 r0 top value=100nF (schematic designator C26)
C27_B1 "CC0603JRNPO9BN221" C0603 12.987,74.75 r0 top value=220pF (schematic designator C27)
C27_B2 "CC0603JRNPO9BN221" C0603 34.987,74.75 r0 top value=220pF (schematic designator C27)
C27_B3 "CC0603JRNPO9BN221" C0603 56.987,74.75 r0 top value=220pF (schematic designator C27)
C27_B4 "CC0603JRNPO9BN221" C0603 78.987,74.75 r0 top value=220pF (schematic designator C27)
C27_B5 "CC0603JRNPO9BN221" C0603 100.987,74.75 r0 top value=220pF (schematic designator C27)
C28_B1 "CC0603JRNPO9BN221" C0603 11.513,74.75 r180 top value=220pF (schematic designator C28)
C28_B2 "CC0603JRNPO9BN221" C0603 33.513,74.75 r180 top value=220pF (schematic designator C28)
C28_B3 "CC0603JRNPO9BN221" C0603 55.513,74.75 r180 top value=220pF (schematic designator C28)
C28_B4 "CC0603JRNPO9BN221" C0603 77.513,74.75 r180 top value=220pF (schematic designator C28)
C28_B5 "CC0603JRNPO9BN221" C0603 99.513,74.75 r180 top value=220pF (schematic designator C28)
C29_B1 "CC1206KKX7R0BB225" FP-CC1206-1_25-IPC_B 15.15,84.25 r180 top value=2.2µF (schematic designator C29)
C29_B2 "CC1206KKX7R0BB225" FP-CC1206-1_25-IPC_B 37.15,84.25 r180 top value=2.2µF (schematic designator C29)
C29_B3 "CC1206KKX7R0BB225" FP-CC1206-1_25-IPC_B 59.15,84.25 r180 top value=2.2µF (schematic designator C29)
C29_B4 "CC1206KKX7R0BB225" FP-CC1206-1_25-IPC_B 81.15,84.25 r180 top value=2.2µF (schematic designator C29)
C29_B5 "CC1206KKX7R0BB225" FP-CC1206-1_25-IPC_B 103.15,84.25 r180 top value=2.2µF (schematic designator C29)
C30_B1 "CC1206KKX7R0BB225" FP-CC1206-1_25-IPC_B 15.15,81.25 r180 top value=2.2µF (schematic designator C30)
C30_B2 "CC1206KKX7R0BB225" FP-CC1206-1_25-IPC_B 37.15,81.25 r180 top value=2.2µF (schematic designator C30)
C30_B3 "CC1206KKX7R0BB225" FP-CC1206-1_25-IPC_B 59.15,81.25 r180 top value=2.2µF (schematic designator C30)
C30_B4 "CC1206KKX7R0BB225" FP-CC1206-1_25-IPC_B 81.15,81.25 r180 top value=2.2µF (schematic designator C30)
C30_B5 "CC1206KKX7R0BB225" FP-CC1206-1_25-IPC_B 103.15,81.25 r180 top value=2.2µF (schematic designator C30)
C31_B1 "EEEFK2A220P" CAP_EEE-FK2A220P_PAN 24.251,79.25 r180 top value=22µF (schematic designator C31)
C31_B2 "EEEFK2A220P" CAP_EEE-FK2A220P_PAN 45.551,79.25 r180 top value=22µF (schematic designator C31)
C31_B3 "EEEFK2A220P" CAP_EEE-FK2A220P_PAN 67.551,79.25 r180 top value=22µF (schematic designator C31)
C31_B4 "EEEFK2A220P" CAP_EEE-FK2A220P_PAN 89.551,79.25 r180 top value=22µF (schematic designator C31)
C31_B5 "EEEFK2A220P" CAP_EEE-FK2A220P_PAN 111.551,79.25 r180 top value=22µF (schematic designator C31)
C32_B1 "EEEFK2A220P" CAP_EEE-FK2A220P_PAN 24.251,88.25 r180 top value=22µF (schematic designator C32)
C32_B2 "EEEFK2A220P" CAP_EEE-FK2A220P_PAN 45.551,88.25 r180 top value=22µF (schematic designator C32)
C32_B3 "EEEFK2A220P" CAP_EEE-FK2A220P_PAN 67.551,88.25 r180 top value=22µF (schematic designator C32)
C32_B4 "EEEFK2A220P" CAP_EEE-FK2A220P_PAN 89.551,88.25 r180 top value=22µF (schematic designator C32)
C32_B5 "EEEFK2A220P" CAP_EEE-FK2A220P_PAN 111.551,88.25 r180 top value=22µF (schematic designator C32)
C33_B1 "CC0805KKX7R0BB224" C0805 13.75,89 r0 top value=220nF (schematic designator C33)
C33_B2 "CC0805KKX7R0BB224" C0805 35.75,89 r0 top value=220nF (schematic designator C33)
C33_B3 "CC0805KKX7R0BB224" C0805 57.75,89 r0 top value=220nF (schematic designator C33)
C33_B4 "CC0805KKX7R0BB224" C0805 79.75,89 r0 top value=220nF (schematic designator C33)
C33_B5 "CC0805KKX7R0BB224" C0805 101.75,89 r0 top value=220nF (schematic designator C33)
C34_B1 "CC0805KKX7R0BB224" C0805 13.75,86.75 r0 top value=220nF (schematic designator C34)
C34_B2 "CC0805KKX7R0BB224" C0805 35.75,86.75 r0 top value=220nF (schematic designator C34)
C34_B3 "CC0805KKX7R0BB224" C0805 57.75,86.75 r0 top value=220nF (schematic designator C34)
C34_B4 "CC0805KKX7R0BB224" C0805 79.75,86.75 r0 top value=220nF (schematic designator C34)
C34_B5 "CC0805KKX7R0BB224" C0805 101.75,86.75 r0 top value=220nF (schematic designator C34)
C35_B1 "EEEFK2A220P" CAP_EEE-FK2A220P_PAN 12.999,27.75 r180 top value=22µF (schematic designator C35)
C35_B2 "EEEFK2A220P" CAP_EEE-FK2A220P_PAN 34.999,27.75 r180 top value=22µF (schematic designator C35)
C35_B3 "EEEFK2A220P" CAP_EEE-FK2A220P_PAN 56.999,27.75 r180 top value=22µF (schematic designator C35)
C35_B4 "EEEFK2A220P" CAP_EEE-FK2A220P_PAN 78.999,27.75 r180 top value=22µF (schematic designator C35)
C35_B5 "EEEFK2A220P" CAP_EEE-FK2A220P_PAN 100.999,27.75 r180 top value=22µF (schematic designator C35)
C36_B1 "CC1206KKX7R0BB225" FP-CC1206-1_25-IPC_B 17.6,22 r0 top value=2.2µF (schematic designator C36)
C36_B2 "CC1206KKX7R0BB225" FP-CC1206-1_25-IPC_B 39.6,22 r0 top value=2.2µF (schematic designator C36)
C36_B3 "CC1206KKX7R0BB225" FP-CC1206-1_25-IPC_B 61.6,22 r0 top value=2.2µF (schematic designator C36)
C36_B4 "CC1206KKX7R0BB225" FP-CC1206-1_25-IPC_B 83.6,22 r0 top value=2.2µF (schematic designator C36)
C36_B5 "CC1206KKX7R0BB225" FP-CC1206-1_25-IPC_B 105.6,22 r0 top value=2.2µF (schematic designator C36)
C37_B1 "CC0805KKX7R0BB224" C0805 18.5,19.75 r180 top value=220nF (schematic designator C37)
C37_B2 "CC0805KKX7R0BB224" C0805 40.5,19.75 r180 top value=220nF (schematic designator C37)
C37_B3 "CC0805KKX7R0BB224" C0805 62.5,19.75 r180 top value=220nF (schematic designator C37)
C37_B4 "CC0805KKX7R0BB224" C0805 84.5,19.75 r180 top value=220nF (schematic designator C37)
C37_B5 "CC0805KKX7R0BB224" C0805 106.5,19.75 r180 top value=220nF (schematic designator C37)
C38 "CC0603KRX7R8BB104" C0603 -0.25,42.113 r270 top value=100nF
C39 "CC0603JPNPO9BN330" C0603 -20.637,85 r180 top value=33pF
C40 "CC0603JPNPO9BN330" C0603 -17.3,84.9 r180 top value=33pF
C41 "CC0603KRX7R8BB104" C0603 -24.763,100.75 r0 top value=100nF
C42 "CC0603KRX7R8BB104" C0603 -13.25,101.75 r180 top value=100nF
C43 "CC0603KRX7R8BB104" C0603 -25.113,92.5 r0 top value=100nF
C44 "CC0603KRX7R8BB104" C0603 -25.113,91 r0 top value=100nF
C45 "CC0603KRX7R8BB104" C0603 -15.137,90.5 r180 top value=100nF
C46 "CC0603KRX7R8BB104" C0603 -13.25,100.25 r180 top value=100nF
C47 "CC0603KRX5R7BB475" C0603 -13.153,44.96 r180 top value=4.7µF
C48 "CC0603KRX5R7BB475" C0603 -13.229,50.04 r180 top value=4.7µF
C49 "CC0603KRX7R8BB104" C0603 -10.95,50.063 r270 top value=100nF
C50_B1 "CC0603KRX7R7BB105" C0603 23.863,39.75 r180 top value=1µF (schematic designator C50)
C50_B2 "CC0603KRX7R7BB105" C0603 45.863,39.75 r180 top value=1µF (schematic designator C50)
C50_B3 "CC0603KRX7R7BB105" C0603 67.863,39.75 r180 top value=1µF (schematic designator C50)
C50_B4 "CC0603KRX7R7BB105" C0603 89.863,39.75 r180 top value=1µF (schematic designator C50)
C50_B5 "CC0603KRX7R7BB105" C0603 111.863,39.75 r180 top value=1µF (schematic designator C50)
C51_B1 "CC0603KRX7R7BB105" C0603 13.5,69.887 r90 top value=1µF (schematic designator C51)
C51_B2 "CC0603KRX7R7BB105" C0603 35.5,69.887 r90 top value=1µF (schematic designator C51)
C51_B3 "CC0603KRX7R7BB105" C0603 57.5,69.887 r90 top value=1µF (schematic designator C51)
C51_B4 "CC0603KRX7R7BB105" C0603 79.5,69.887 r90 top value=1µF (schematic designator C51)
C51_B5 "CC0603KRX7R7BB105" C0603 101.5,69.887 r90 top value=1µF (schematic designator C51)
C52_B1 "CC0603KRX7R7BB105" C0603 20.387,96.75 r0 top value=1µF (schematic designator C52)
C52_B2 "CC0603KRX7R7BB105" C0603 42.387,96.75 r0 top value=1µF (schematic designator C52)
C52_B3 "CC0603KRX7R7BB105" C0603 64.387,96.75 r0 top value=1µF (schematic designator C52)
C52_B4 "CC0603KRX7R7BB105" C0603 86.387,96.75 r0 top value=1µF (schematic designator C52)
C52_B5 "CC0603KRX7R7BB105" C0603 108.387,96.75 r0 top value=1µF (schematic designator C52)
C53 "CC0603KRX7R8BB104" C0603 -12.5,71.387 r90 top value=100nF
C54 "CC0603KRX7R8BB104" C0603 -9.5,59.137 r90 top value=100nF
C55 "CC0603KRX7R7BB105" C0603 -17,55.637 r90 top value=1µF
C56 "CC0603KRX7R8BB104" C0603 -15.5,55.637 r90 top value=100nF
C57 "CC0603KRX7R7BB105" C0603 -14,55.637 r90 top value=1µF
C58 "CC0603KRX7R8BB104" C0603 -12.5,55.637 r90 top value=100nF
C59 "CC0603KRX5R7BB475" C0603 -13.537,69.31 r0 top value=4.7µF
C60 "CC0603KRX5R7BB475" C0603 -13.537,64.21 r0 top value=4.7µF
C61 "CC0603KRX7R8BB104" C0603 -15.824,64.497 r90 top value=100nF
C62_B1 "CC0603JRX7R0BB104" C0603 20,37.263 r270 top value=100nF (schematic designator C62)
C62_B2 "CC0603JRX7R0BB104" C0603 42,37.263 r270 top value=100nF (schematic designator C62)
C62_B3 "CC0603JRX7R0BB104" C0603 64,37.263 r270 top value=100nF (schematic designator C62)
C62_B4 "CC0603JRX7R0BB104" C0603 86,37.263 r270 top value=100nF (schematic designator C62)
C62_B5 "CC0603JRX7R0BB104" C0603 108,37.263 r270 top value=100nF (schematic designator C62)
C63_B1 "CC0603JRX7R0BB104" C0603 22,95.263 r270 top value=100nF (schematic designator C63)
C63_B2 "CC0603JRX7R0BB104" C0603 44,95.263 r270 top value=100nF (schematic designator C63)
C63_B3 "CC0603JRX7R0BB104" C0603 66,95.263 r270 top value=100nF (schematic designator C63)
C63_B4 "CC0603JRX7R0BB104" C0603 88,95.263 r270 top value=100nF (schematic designator C63)
C63_B5 "CC0603JRX7R0BB104" C0603 110,95.263 r270 top value=100nF (schematic designator C63)
C64 "EEEFK2A220P" CAP_EEE-FK2A220P_PAN 101,121.5 r90 top value=22µF
C65 "EEEFK2A220P" CAP_EEE-FK2A220P_PAN 101,153.5 r270 top value=22µF
C66 "CC0805KKX7R0BB224" C0805 108.278,153.5 r180 top value=220nF
C67 "CC0805KKX7R0BB224" C0805 108.278,155.5 r180 top value=220nF
C68 "CC0603JRX7R0BB104" C0603 -25.099,77.464 r180 top value=100nF
C69 "CC1206KKX7R0BB225" FP-CC1206-1_25-IPC_B -30.958,80.52 r180 top value=2.2µF
C70 "CC1206KKX7R0BB225" FP-CC1206-1_25-IPC_B -30.958,77.98 r180 top value=2.2µF
C71 "CC0603JRX7R0BB104" C0603 -29.387,82.5 r180 top value=100nF
C72 "CC1206KKX7R6BB226" FP-CC1206-1_25-IPC_B -28.15,61.5 r180 top value=22µF
C73 "CC1206KKX7R6BB226" FP-CC1206-1_25-IPC_B -23.1,61.5 r0 top value=22µF
C74 "CC1206KKX7R6BB226" FP-CC1206-1_25-IPC_B -28.15,58.75 r180 top value=22µF
C75 "CC1206KKX7R6BB226" FP-CC1206-1_25-IPC_B -23.1,58.75 r0 top value=22µF
C76 "CC0603KRX7R8BB104" C0603 5.5,24.237 r90 top value=100nF
C77 "CC0603JPNPO9BN330" C0603 -25.741,1.741 r135 top value=33pF
C78 "CC0603JPNPO9BN330" C0603 -24.64,0.64 r315 top value=33pF
C79 "CC0603KRX7R8BB104" C0603 -10.25,107.113 r270 top value=100nF
C80 "CC0603KRX5R7BB475" C0603 -3.363,101.25 r0 top value=4.7µF
C81 "CC0603KRX7R8BB104" C0603 -10.25,104.263 r270 top value=100nF
C82 "CC0603KRX5R7BB475" C0603 -10.6,96.887 r90 top value=4.7µF
C83 "CC0603KRX7R8BB104" C0603 -11.9,96.887 r90 top value=100nF
C84 "CC0603KRX7R8BB104" C0603 -32.5,36.763 r270 top value=100nF
C85 "CC0805KKX7R0BB224" C0805 106.5,123.5 r90 top value=220nF
C87_B1 "CC0603KRX7R7BB105" C0603 23.887,31.25 r0 top value=1µF (schematic designator C87)
C87_B2 "CC0603KRX7R7BB105" C0603 45.887,31.25 r0 top value=1µF (schematic designator C87)
C87_B3 "CC0603KRX7R7BB105" C0603 67.887,31.25 r0 top value=1µF (schematic designator C87)
C87_B4 "CC0603KRX7R7BB105" C0603 89.887,31.25 r0 top value=1µF (schematic designator C87)
C87_B5 "CC0603KRX7R7BB105" C0603 111.887,31.25 r0 top value=1µF (schematic designator C87)
C88_B1 "CC0603KRX7R8BB104" C0603 28.763,31.25 r180 top value=100nF (schematic designator C88)
C88_B2 "CC0603KRX7R8BB104" C0603 50.763,31.25 r180 top value=100nF (schematic designator C88)
C88_B3 "CC0603KRX7R8BB104" C0603 72.763,31.25 r180 top value=100nF (schematic designator C88)
C88_B4 "CC0603KRX7R8BB104" C0603 94.763,31.25 r180 top value=100nF (schematic designator C88)
C88_B5 "CC0603KRX7R8BB104" C0603 116.763,31.25 r180 top value=100nF (schematic designator C88)
C89 "CC0603KRX7R8BB104" C0603 4,24.237 r90 top value=100nF
C90 "CC0603KRX7R8BB104" C0603 2.5,24.237 r90 top value=100nF
C91 "CC0603KRX7R8BB104" C0603 1,24.25 r90 top value=100nF
C92 "CC0603KRX7R8BB104" C0603 -0.5,24.25 r90 top value=100nF
C93 "CC0603KRX7R9BB102" C0603 0,48.613 r270 top value=1nF
C94 "CC0603KRX7R8BB104" C0603 -5,46.987 r90 top value=100nF
CR1 "USBLC6-2SC6" SOT23-6L_STM -19.75,105.5 r90 top
CR2 "USBLC6-2SC6" SOT23-6L_STM -7.05,105.5 r90 top
D1_B1 "LED EMERALD 0805" "0805 LED" 24.6,24.5 r180 top (schematic designator D1)
D1_B2 "LED EMERALD 0805" "0805 LED" 46.6,24.5 r180 top (schematic designator D1)
D1_B3 "LED EMERALD 0805" "0805 LED" 68.6,24.5 r180 top (schematic designator D1)
D1_B4 "LED EMERALD 0805" "0805 LED" 90.6,24.5 r180 top (schematic designator D1)
D1_B5 "LED EMERALD 0805" "0805 LED" 112.6,24.5 r180 top (schematic designator D1)
D2 "LED EMERALD 0805" "0805 LED" -30.75,101 r90 top
D3 "LED RED 0805" "0805 LED" -30.75,104.4 r90 top
D4_B1 "LED RED 0805" "0805 LED" 20.4,24.5 r180 top (schematic designator D4)
D4_B2 "LED RED 0805" "0805 LED" 42.4,24.5 r180 top (schematic designator D4)
D4_B3 "LED RED 0805" "0805 LED" 64.4,24.5 r180 top (schematic designator D4)
D4_B4 "LED RED 0805" "0805 LED" 86.4,24.5 r180 top (schematic designator D4)
D4_B5 "LED RED 0805" "0805 LED" 108.4,24.5 r180 top (schematic designator D4)
D5_B1 "MBD54DWT1G" ONSC-SOT-363-6-419B-02_W_V 12.25,77 r270 top value=10pF (schematic designator D5)
D5_B2 "MBD54DWT1G" ONSC-SOT-363-6-419B-02_W_V 34.25,77 r270 top value=10pF (schematic designator D5)
D5_B3 "MBD54DWT1G" ONSC-SOT-363-6-419B-02_W_V 56.25,77 r270 top value=10pF (schematic designator D5)
D5_B4 "MBD54DWT1G" ONSC-SOT-363-6-419B-02_W_V 78.25,77 r270 top value=10pF (schematic designator D5)
D5_B5 "MBD54DWT1G" ONSC-SOT-363-6-419B-02_W_V 100.25,77 r270 top value=10pF (schematic designator D5)
D6 "LED RED 0805" "0805 LED" -7,94.25 r180 top
D7 "LED EMERALD 0805" "0805 LED" -10.5,94.25 r0 top
D8 "ESDALC6V1-1U2" FP-ST0201-MFG -29,33.75 r90 top value=12pF
D9 "LED EMERALD 0805" "0805 LED" 6.25,102.5 r0 top
D10 "LED EMERALD 0805" "0805 LED" 6.25,104.75 r0 top
D11 "LED EMERALD 0805" "0805 LED" 6.25,100.25 r0 top
D12 "LED EMERALD 0805" "0805 LED" -0.65,37 r0 top
D13 "LED RED 0805" "0805 LED" -0.65,34.75 r0 top
D14 "LED EMERALD 0805" "0805 LED" -0.65,32.5 r0 top
D15 "5.0SMDJ58A" 5.0SMDJSeries_LTF 104.5,112.25 r180 top
D16 "PMEG6010CEH" FP-SOD123-IPC_A -19.5,82.5 r0 top
D17 "5.0SMDJ58A" 5.0SMDJSeries_LTF 92.376,112.25 r180 top
H1 "MH_M3" MH_M3-Footprint-1 -34.5,90.5 r0 top
H2 "MH_M3" MH_M3-Footprint-1 58,113 r0 top
H3 "MH_M3" MH_M3-Footprint-1 -34.5,56.5 r0 top
H4 "MH_M3" MH_M3-Footprint-1 -34.5,22.5 r0 top
H5 "MH_M3" MH_M3-Footprint-1 119.5,22.5 r0 top
H7 "MH_M3" MH_M3-Footprint-1 119.5,90.5 r0 top
H8 "MH_M3" MH_M3-Footprint-1 119.5,56.5 r0 top
H9 "MH_M3" MH_M3-Footprint-1 14.5,113 r0 top
H10 "MH_M3" MH_M3-Footprint-1 0,0 r0 top
H11 "MH_M3" MH_M3-Footprint-1 115.5,158 r0 top
J1 "BM04B-GHS-TBT" CONN_BM04B-GHS-TBT_JST -1.5,87.25 r180 top
J3 "47590-0001" USB -20.8,108.825 r180 top
J4 "BM04B-GHS-TBT" CONN_BM04B-GHS-TBT_JST -1.525,79.127 r180 top
J5 "BM04B-GHS-TBT" CONN_BM04B-GHS-TBT_JST -1.475,54.626 r180 top
J7 "90120-0125" FP-90120-0125-MFG -27.5,94.08 r90 top
J8 "BM04B-GHS-TBT" CONN_BM04B-GHS-TBT_JST -1.475,62.627 r180 top
J9 "BM04B-GHS-TBT" CONN_BM04B-GHS-TBT_JST -1.525,70.876 r180 top
J10 "47590-0001" USB -8.05,108.825 r180 top
L1_B1 "VER2923-333KL" IND_VER2923_COC 19.73,63.01 r270 top locked (schematic designator L1)
L1_B2 "VER2923-333KL" IND_VER2923_COC 41.73,63.01 r270 top (schematic designator L1)
L1_B3 "VER2923-333KL" IND_VER2923_COC 63.73,63.01 r270 top (schematic designator L1)
L1_B4 "VER2923-333KL" IND_VER2923_COC 85.73,63.01 r270 top (schematic designator L1)
L1_B5 "VER2923-333KL" IND_VER2923_COC 107.73,63.01 r270 top (schematic designator L1)
L2 "DO3316P-153MLD" COIL-DO3316P_V -28.168,69.659 r270 top value=15µH
P1 "TSW-103-07-G-D" SMTC-TSW-103-07-G-D_V -25.5,53.98 r180 top
P2 "CON_SWD" "SMD, P=1.27mm" -30.226,43.663 r270 top value=FTSH-105-01-F-DV-K-P-TR
Q1 "BC847C-QR" TO-236AB-3 -23.95,105.575 r0 top
Q2 "BSC040N10NS5ATMA1" FP-PG-TDSON-8-MFG 100.05,144 r90 top
Q3 "BSC040N10NS5ATMA1" FP-PG-TDSON-8-MFG 100.05,137.5 r90 top
Q4 "BSC040N10NS5ATMA1" FP-PG-TDSON-8-MFG 100.05,131 r90 top
R1 "RC0603JR-070RL" RESC1608X55X25ML10T15 -16.78,-2.03 r45 top value=0Ω
R2 "RC0603FR-0760R4L" RESC1608X55X25ML10T15 -8.198,77.075 r90 top value=60.4Ω
R3 "RC0603FR-0760R4L" RESC1608X55X25ML10T15 -8.198,74.575 r90 top value=60.4Ω
R4_B1 "WSLF25123L000FEB" RES_3L000FEB_VIS 14.5,36.25 r90 top (schematic designator R4)
R4_B2 "WSLF25123L000FEB" RES_3L000FEB_VIS 36.5,36.25 r90 top (schematic designator R4)
R4_B3 "WSLF25123L000FEB" RES_3L000FEB_VIS 58.5,36.25 r90 top (schematic designator R4)
R4_B4 "WSLF25123L000FEB" RES_3L000FEB_VIS 80.5,36.25 r90 top (schematic designator R4)
R4_B5 "WSLF25123L000FEB" RES_3L000FEB_VIS 102.5,36.25 r90 top (schematic designator R4)
R5_B1 "WSLF25123L000FEB" RES_3L000FEB_VIS 16.5,94.281 r90 top (schematic designator R5)
R5_B2 "WSLF25123L000FEB" RES_3L000FEB_VIS 38.5,94.281 r90 top (schematic designator R5)
R5_B3 "WSLF25123L000FEB" RES_3L000FEB_VIS 60.5,94.281 r90 top (schematic designator R5)
R5_B4 "WSLF25123L000FEB" RES_3L000FEB_VIS 82.5,94.281 r90 top (schematic designator R5)
R5_B5 "WSLF25123L000FEB" RES_3L000FEB_VIS 104.5,94.281 r90 top (schematic designator R5)
R6_B1 "RC0603FR-07100RL" RESC1608X55X25ML10T15 14.25,77 r90 top value=100Ω (schematic designator R6)
R6_B2 "RC0603FR-07100RL" RESC1608X55X25ML10T15 36.25,77 r90 top value=100Ω (schematic designator R6)
R6_B3 "RC0603FR-07100RL" RESC1608X55X25ML10T15 58.25,77 r90 top value=100Ω (schematic designator R6)
R6_B4 "RC0603FR-07100RL" RESC1608X55X25ML10T15 80.25,77 r90 top value=100Ω (schematic designator R6)
R6_B5 "RC0603FR-07100RL" RESC1608X55X25ML10T15 102.25,77 r90 top value=100Ω (schematic designator R6)
R7_B1 "RC0603FR-07100RL" RESC1608X55X25ML10T15 10.25,77 r90 top value=100Ω (schematic designator R7)
R7_B2 "RC0603FR-07100RL" RESC1608X55X25ML10T15 32.25,77 r90 top value=100Ω (schematic designator R7)
R7_B3 "RC0603FR-07100RL" RESC1608X55X25ML10T15 54.25,77 r90 top value=100Ω (schematic designator R7)
R7_B4 "RC0603FR-07100RL" RESC1608X55X25ML10T15 76.25,77 r90 top value=100Ω (schematic designator R7)
R7_B5 "RC0603FR-07100RL" RESC1608X55X25ML10T15 98.25,77 r90 top value=100Ω (schematic designator R7)
R8 "RC0603FR-07100KL" RESC1608X55X25ML10T15 -23.5,77.5 r270 top value=100kΩ
R9_B1 "RC0603FR-0710KL" RESC1608X55X25ML10T15 28,69 r270 top value=10kΩ (schematic designator R9)
R9_B2 "RC0603FR-0710KL" RESC1608X55X25ML10T15 50,69 r270 top value=10kΩ (schematic designator R9)
R9_B3 "RC0603FR-0710KL" RESC1608X55X25ML10T15 72,69 r270 top value=10kΩ (schematic designator R9)
R9_B4 "RC0603FR-0710KL" RESC1608X55X25ML10T15 94,69 r270 top value=10kΩ (schematic designator R9)
R9_B5 "RC0603FR-0710KL" RESC1608X55X25ML10T15 116,69 r270 top value=10kΩ (schematic designator R9)
R10 "RC0603JR-070RL" RESC1608X55X25ML10T15 1.25,16.25 r270 top value=0Ω
R11_B1 "RC0603JR-070RL" RESC1608X55X25ML10T15 27.75,98.25 r0 top value=0Ω (schematic designator R11)
R11_B2 "RC0603JR-070RL" RESC1608X55X25ML10T15 49.75,98.25 r0 top value=0Ω (schematic designator R11)
R11_B3 "RC0603JR-070RL" RESC1608X55X25ML10T15 71.75,98.25 r0 top value=0Ω (schematic designator R11)
R11_B4 "RC0603JR-070RL" RESC1608X55X25ML10T15 93.75,98.25 r0 top value=0Ω (schematic designator R11)
R11_B5 "RC0603JR-070RL" RESC1608X55X25ML10T15 115.75,98.25 r0 top value=0Ω (schematic designator R11)
R12_B1 "RC0603JR-070RL" RESC1608X55X25ML10T15 27,40.5 r270 top value=0Ω (schematic designator R12)
R12_B2 "RC0603JR-070RL" RESC1608X55X25ML10T15 49,40.5 r270 top value=0Ω (schematic designator R12)
R12_B3 "RC0603JR-070RL" RESC1608X55X25ML10T15 71,40.5 r270 top value=0Ω (schematic designator R12)
R12_B4 "RC0603JR-070RL" RESC1608X55X25ML10T15 93,40.5 r270 top value=0Ω (schematic designator R12)
R12_B5 "RC0603JR-070RL" RESC1608X55X25ML10T15 115,40.5 r270 top value=0Ω (schematic designator R12)
R13_B1 "RC0603JR-070RL" RESC1608X55X25ML10T15 25,98.25 r180 top value=0Ω (schematic designator R13)
R13_B2 "RC0603JR-070RL" RESC1608X55X25ML10T15 47,98.25 r180 top value=0Ω (schematic designator R13)
R13_B3 "RC0603JR-070RL" RESC1608X55X25ML10T15 69,98.25 r180 top value=0Ω (schematic designator R13)
R13_B4 "RC0603JR-070RL" RESC1608X55X25ML10T15 91,98.25 r180 top value=0Ω (schematic designator R13)
R13_B5 "RC0603JR-070RL" RESC1608X55X25ML10T15 113,98.25 r180 top value=0Ω (schematic designator R13)
R14 "RC0603JR-070RL" RESC1608X55X25ML10T15 -25.5,33 r90 top value=0Ω
R15 "RC0603JR-070RL" RESC1608X55X25ML10T15 -23.75,33 r90 top value=0Ω
R16_B1 "RC0603FR-074K7L" RESC1608X55X25ML10T15 22,29.75 r0 top value=4.7kΩ (schematic designator R16)
R16_B2 "RC0603FR-074K7L" RESC1608X55X25ML10T15 44,29.75 r0 top value=4.7kΩ (schematic designator R16)
R16_B3 "RC0603FR-074K7L" RESC1608X55X25ML10T15 66,29.75 r0 top value=4.7kΩ (schematic designator R16)
R16_B4 "RC0603FR-074K7L" RESC1608X55X25ML10T15 88,29.75 r0 top value=4.7kΩ (schematic designator R16)
R16_B5 "RC0603FR-074K7L" RESC1608X55X25ML10T15 110,29.75 r0 top value=4.7kΩ (schematic designator R16)
R17 "RC0603JR-070RL" RESC1608X55X25ML10T15 2.5,16.25 r270 top value=0Ω
R18 "RC0603JR-070RL" RESC1608X55X25ML10T15 3.75,16.25 r270 top value=0Ω
R19 "RC0603JR-070RL" RESC1608X55X25ML10T15 5,16.25 r270 top value=0Ω
R20 "RC0603JR-070RL" RESC1608X55X25ML10T15 6.25,16.25 r270 top value=0Ω
R21 "RC0603FR-101KL" RESC1608X55X25ML10T15 5.5,28.75 r270 top value=1kΩ
R22 "RC0603FR-101KL" RESC1608X55X25ML10T15 4,28.75 r270 top value=1kΩ
R23 "RC0603FR-101KL" RESC1608X55X25ML10T15 2.5,28.75 r270 top value=1kΩ
R24 "RC0603FR-101KL" RESC1608X55X25ML10T15 1,28.75 r270 top value=1kΩ
R25 "RC0603FR-101KL" RESC1608X55X25ML10T15 -0.5,28.75 r270 top value=1kΩ
R30 "RC0603FR-0719K1L" RESC1608X55X25ML10T15 -23.5,80.5 r270 top value=19.1kΩ
R31 "RC0603FR-07100KL" RESC1608X55X25ML10T15 -3.75,44.5 r180 top value=100kΩ
R32 "RC0603FR-07100KL" RESC1608X55X25ML10T15 -4.75,41.25 r270 top value=100kΩ
R34_B1 "NCU18XH103F6SRB" FP-NCU18-0_15-IPC_A 26.25,71.75 r0 top value=10kΩ (schematic designator R34)
R34_B2 "NCU18XH103F6SRB" FP-NCU18-0_15-IPC_A 48.25,71.75 r0 top value=10kΩ (schematic designator R34)
R34_B3 "NCU18XH103F6SRB" FP-NCU18-0_15-IPC_A 70.25,71.75 r0 top value=10kΩ (schematic designator R34)
R34_B4 "NCU18XH103F6SRB" FP-NCU18-0_15-IPC_A 92.25,71.75 r0 top value=10kΩ (schematic designator R34)
R34_B5 "NCU18XH103F6SRB" FP-NCU18-0_15-IPC_A 114.25,71.75 r0 top value=10kΩ (schematic designator R34)
R35 "RC0603FR-0710KL" RESC1608X55X25ML10T15 -14.75,88.25 r180 top value=10kΩ
R36 "RC0603FR-07100RL" RESC1608X55X25ML10T15 -17,102.75 r180 top value=100Ω
R37 "RC0603FR-07100KL" RESC1608X55X25ML10T15 -25,88.75 r270 top value=100kΩ
R38 "RC0603FR-07100KL" RESC1608X55X25ML10T15 -14.75,86.75 r180 top value=100kΩ
R39 "RC0603FR-0710KL" RESC1608X55X25ML10T15 -27.25,102.975 r0 top value=10kΩ
R40 "RC0603FR-07100RL" RESC1608X55X25ML10T15 -27.25,106.375 r0 top value=100Ω
R41 "RC0603FR-0710KL" RESC1608X55X25ML10T15 -27.25,104.675 r180 top value=10kΩ
R42 "RC0603JR-071K5L" RESC1608X55X25ML10T15 -24.35,103.025 r180 top value=1.5kΩ
R43 "RC0603FR-101KL" RESC1608X55X25ML10T15 -30.75,97.75 r90 top value=1kΩ
R44 "RC0603FR-101KL" RESC1608X55X25ML10T15 -30.75,107.5 r90 top value=1kΩ
R45_B1 "RC0603FR-101KL" RESC1608X55X25ML10T15 24.75,26.5 r180 top value=1kΩ (schematic designator R45)
R45_B2 "RC0603FR-101KL" RESC1608X55X25ML10T15 46.75,26.5 r180 top value=1kΩ (schematic designator R45)
R45_B3 "RC0603FR-101KL" RESC1608X55X25ML10T15 68.75,26.5 r180 top value=1kΩ (schematic designator R45)
R45_B4 "RC0603FR-101KL" RESC1608X55X25ML10T15 90.75,26.5 r180 top value=1kΩ (schematic designator R45)
R45_B5 "RC0603FR-101KL" RESC1608X55X25ML10T15 112.75,26.5 r180 top value=1kΩ (schematic designator R45)
R46_B1 "RC0603FR-101KL" RESC1608X55X25ML10T15 20.25,26.5 r0 top value=1kΩ (schematic designator R46)
R46_B2 "RC0603FR-101KL" RESC1608X55X25ML10T15 42.25,26.5 r0 top value=1kΩ (schematic designator R46)
R46_B3 "RC0603FR-101KL" RESC1608X55X25ML10T15 64.25,26.5 r0 top value=1kΩ (schematic designator R46)
R46_B4 "RC0603FR-101KL" RESC1608X55X25ML10T15 86.25,26.5 r0 top value=1kΩ (schematic designator R46)
R46_B5 "RC0603FR-101KL" RESC1608X55X25ML10T15 108.25,26.5 r0 top value=1kΩ (schematic designator R46)
R47 "RC0603FR-0710KL" RESC1608X55X25ML10T15 -10.95,46.3 r90 top value=10kΩ
R48 "RC0603FR-074K7L" RESC1608X55X25ML10T15 -24.75,26.75 r90 top value=4.7kΩ
R49 "RC0603FR-074K7L" RESC1608X55X25ML10T15 -26.25,26.75 r90 top value=4.7kΩ
R50 "RC0603FR-0760R4L" RESC1608X55X25ML10T15 -8,61.25 r90 top value=60.4Ω
R51 "RC0603FR-0760R4L" RESC1608X55X25ML10T15 -8,58.75 r90 top value=60.4Ω
R52 "RC0603FR-0710KL" RESC1608X55X25ML10T15 -15.824,68.26 r270 top value=10kΩ
R53_B1 "RC0603FR-07100RL" RESC1608X55X25ML10T15 18,35.75 r180 top value=100Ω (schematic designator R53)
R53_B2 "RC0603FR-07100RL" RESC1608X55X25ML10T15 40,35.75 r180 top value=100Ω (schematic designator R53)
R53_B3 "RC0603FR-07100RL" RESC1608X55X25ML10T15 62,35.75 r180 top value=100Ω (schematic designator R53)
R53_B4 "RC0603FR-07100RL" RESC1608X55X25ML10T15 84,35.75 r180 top value=100Ω (schematic designator R53)
R53_B5 "RC0603FR-07100RL" RESC1608X55X25ML10T15 106,35.75 r180 top value=100Ω (schematic designator R53)
R54_B1 "RC0603FR-07100RL" RESC1608X55X25ML10T15 18,37.25 r180 top value=100Ω (schematic designator R54)
R54_B2 "RC0603FR-07100RL" RESC1608X55X25ML10T15 40,37.25 r180 top value=100Ω (schematic designator R54)
R54_B3 "RC0603FR-07100RL" RESC1608X55X25ML10T15 62,37.25 r180 top value=100Ω (schematic designator R54)
R54_B4 "RC0603FR-07100RL" RESC1608X55X25ML10T15 84,37.25 r180 top value=100Ω (schematic designator R54)
R54_B5 "RC0603FR-07100RL" RESC1608X55X25ML10T15 106,37.25 r180 top value=100Ω (schematic designator R54)
R55_B1 "RC0603FR-07100RL" RESC1608X55X25ML10T15 20,93.75 r180 top value=100Ω (schematic designator R55)
R55_B2 "RC0603FR-07100RL" RESC1608X55X25ML10T15 42,93.75 r180 top value=100Ω (schematic designator R55)
R55_B3 "RC0603FR-07100RL" RESC1608X55X25ML10T15 64,93.75 r180 top value=100Ω (schematic designator R55)
R55_B4 "RC0603FR-07100RL" RESC1608X55X25ML10T15 86,93.75 r180 top value=100Ω (schematic designator R55)
R55_B5 "RC0603FR-07100RL" RESC1608X55X25ML10T15 108,93.75 r180 top value=100Ω (schematic designator R55)
R56_B1 "RC0603FR-07100RL" RESC1608X55X25ML10T15 20,95.25 r180 top value=100Ω (schematic designator R56)
R56_B2 "RC0603FR-07100RL" RESC1608X55X25ML10T15 42,95.25 r180 top value=100Ω (schematic designator R56)
R56_B3 "RC0603FR-07100RL" RESC1608X55X25ML10T15 64,95.25 r180 top value=100Ω (schematic designator R56)
R56_B4 "RC0603FR-07100RL" RESC1608X55X25ML10T15 86,95.25 r180 top value=100Ω (schematic designator R56)
R56_B5 "RC0603FR-07100RL" RESC1608X55X25ML10T15 108,95.25 r180 top value=100Ω (schematic designator R56)
R58 "DNP" RESC1608X55X25ML10T15 -2.5,102.75 r180 top value=0Ω
R59 "RC0603JR-070RL" RESC1608X55X25ML10T15 -3.75,95.25 r90 top value=0Ω
R60 "RC0603JR-070RL" RESC1608X55X25ML10T15 -2.25,95.25 r90 top value=0Ω
R61 "RC0603FR-072K2L" RESC1608X55X25ML10T15 -10.6,100.5 r270 top value=2.2kΩ
R62 "RC0603FR-101KL" RESC1608X55X25ML10T15 -2.5,99.75 r0 top value=1kΩ
R63 "RC0603FR-101KL" RESC1608X55X25ML10T15 -7,92.5 r180 top value=1kΩ
R64 "RC0603FR-101KL" RESC1608X55X25ML10T15 -10.5,92.5 r0 top value=1kΩ
R65 "RC0603FR-0710KL" RESC1608X55X25ML10T15 -29.75,19.5 r225 top value=10kΩ
R66 "RC0603FR-0710KL" RESC1608X55X25ML10T15 -32.5,10.25 r90 top value=10kΩ
R67 "RC0603FR-0710KL" RESC1608X55X25ML10T15 -32.5,13 r90 top value=10kΩ
R68 "RC0603FR-101KL" RESC1608X55X25ML10T15 2.75,102.5 r0 top value=1kΩ
R69 "RC0603FR-101KL" RESC1608X55X25ML10T15 2.75,104.75 r0 top value=1kΩ
R70 "RC0603FR-101KL" RESC1608X55X25ML10T15 2.75,100.25 r0 top value=1kΩ
R71 "RC0603FR-0710KL" RESC1608X55X25ML10T15 108.5,124.25 r270 top value=10kΩ
R75 "RC0603FR-101KL" RESC1608X55X25ML10T15 -4,37 r0 top value=1kΩ
R76 "RC0603FR-101KL" RESC1608X55X25ML10T15 -4,34.75 r180 top value=1kΩ
R77 "RC0603FR-101KL" RESC1608X55X25ML10T15 -4,32.5 r0 top value=1kΩ
R78 "RC0603JR-070RL" RESC1608X55X25ML10T15 -27.75,26.75 r270 top value=0Ω
R79 "RC0603JR-070RL" RESC1608X55X25ML10T15 -29.25,26.75 r270 top value=0Ω
R80 "RC0603FR-074K7L" RESC1608X55X25ML10T15 -30.53,5.97 r225 top value=4.7kΩ
R81 "RC0603FR-074K7L" RESC1608X55X25ML10T15 -31.5,7 r225 top value=4.7kΩ
R82 "RC0603JR-070RL" RESC1608X55X25ML10T15 -27.25,33 r90 top value=0Ω
R83_B1 "RC0603FR-0710KL" RESC1608X55X25ML10T15 27.75,28.25 r0 top value=10kΩ (schematic designator R83)
R83_B2 "RC0603FR-0710KL" RESC1608X55X25ML10T15 49.75,28.25 r0 top value=10kΩ (schematic designator R83)
R83_B3 "RC0603FR-0710KL" RESC1608X55X25ML10T15 71.75,28.25 r0 top value=10kΩ (schematic designator R83)
R83_B4 "RC0603FR-0710KL" RESC1608X55X25ML10T15 93.75,28.25 r0 top value=10kΩ (schematic designator R83)
R83_B5 "RC0603FR-0710KL" RESC1608X55X25ML10T15 115.75,28.25 r0 top value=10kΩ (schematic designator R83)
R84_B1 "RC0603FR-0710KL" RESC1608X55X25ML10T15 24.75,29.75 r0 top value=10kΩ (schematic designator R84)
R84_B2 "RC0603FR-0710KL" RESC1608X55X25ML10T15 46.75,29.75 r0 top value=10kΩ (schematic designator R84)
R84_B3 "RC0603FR-0710KL" RESC1608X55X25ML10T15 68.75,29.75 r0 top value=10kΩ (schematic designator R84)
R84_B4 "RC0603FR-0710KL" RESC1608X55X25ML10T15 90.75,29.75 r0 top value=10kΩ (schematic designator R84)
R84_B5 "RC0603FR-0710KL" RESC1608X55X25ML10T15 112.75,29.75 r0 top value=10kΩ (schematic designator R84)
R85_B1 "RC0603FR-0710KL" RESC1608X55X25ML10T15 24.75,28.25 r0 top value=10kΩ (schematic designator R85)
R85_B2 "RC0603FR-0710KL" RESC1608X55X25ML10T15 46.75,28.25 r0 top value=10kΩ (schematic designator R85)
R85_B3 "RC0603FR-0710KL" RESC1608X55X25ML10T15 68.75,28.25 r0 top value=10kΩ (schematic designator R85)
R85_B4 "RC0603FR-0710KL" RESC1608X55X25ML10T15 90.75,28.25 r0 top value=10kΩ (schematic designator R85)
R85_B5 "RC0603FR-0710KL" RESC1608X55X25ML10T15 112.75,28.25 r0 top value=10kΩ (schematic designator R85)
R86_B1 "RC0603JR-070RL" RESC1608X55X25ML10T15 28.5,40.5 r270 top value=0Ω (schematic designator R86)
R86_B2 "RC0603JR-070RL" RESC1608X55X25ML10T15 50.5,40.5 r270 top value=0Ω (schematic designator R86)
R86_B3 "RC0603JR-070RL" RESC1608X55X25ML10T15 72.5,40.5 r270 top value=0Ω (schematic designator R86)
R86_B4 "RC0603JR-070RL" RESC1608X55X25ML10T15 94.5,40.5 r270 top value=0Ω (schematic designator R86)
R86_B5 "RC0603JR-070RL" RESC1608X55X25ML10T15 116.5,40.5 r270 top value=0Ω (schematic designator R86)
R92 "RC0603FR-101KL" RESC1608X55X25ML10T15 -1.75,41.25 r270 top value=1kΩ
R93 "RC0603FR-135K23L" RESC1608X55X25ML10T15 -3.25,41.25 r90 top value=5.23kΩ
R94 "RC0603FR-072K05L" RESC1608X55X25ML10T15 -0.75,44.5 r180 top value=2.05kΩ
R95 "RC0603FR-074K7L" RESC1608X55X25ML10T15 -30.75,26.75 r90 top value=4.7kΩ
R96 "RC0603FR-074K7L" RESC1608X55X25ML10T15 -29.53,4.97 r225 top value=4.7kΩ
S1 "SMD Push Button" "SMD Push Button-Footprint-1" -30.938,33.332 r270 top
SP1_B1 "Solder Pad" "Solder Pad-Footprint-1" 8,10.5 r0 top (schematic designator SP1)
SP1_B2 "Solder Pad" "Solder Pad-Footprint-1" 30,10.5 r0 top (schematic designator SP1)
SP1_B3 "Solder Pad" "Solder Pad-Footprint-1" 52,10.5 r0 top (schematic designator SP1)
SP1_B4 "Solder Pad" "Solder Pad-Footprint-1" 74,10.5 r0 top (schematic designator SP1)
SP1_B5 "Solder Pad" "Solder Pad-Footprint-1" 96,10.5 r0 top (schematic designator SP1)
SP2_B1 "Solder Pad" "Solder Pad-Footprint-1" 19,10.5 r0 top (schematic designator SP2)
SP2_B2 "Solder Pad" "Solder Pad-Footprint-1" 41,10.5 r0 top (schematic designator SP2)
SP2_B3 "Solder Pad" "Solder Pad-Footprint-1" 63,10.5 r0 top (schematic designator SP2)
SP2_B4 "Solder Pad" "Solder Pad-Footprint-1" 85,10.5 r0 top (schematic designator SP2)
SP2_B5 "Solder Pad" "Solder Pad-Footprint-1" 107,10.5 r0 top (schematic designator SP2)
SP3 "Solder Pad" "Solder Pad-Footprint-1" 85.5,136 r270 top
SP4 "Solder Pad" "Solder Pad-Footprint-1" 85.5,158 r270 top
SP5 "Solder Pad" "Solder Pad-Footprint-1" 85.5,147 r270 top
SP6 "Solder Pad" "Solder Pad-Footprint-1" 85.5,125 r270 top
U1 "STM32H743ZIT6" LQFP144-20x20mm -15.15,14.7 r45 top
U2 "STM32F103CBT6" STM-LQFP48_N -19.2,96.325 r90 top
U3 "TCAN1044DRBRQ1" SON_4DRBRQ1_TEX -16,75.75 r0 top
U4 "ESDCAN05-2BWY" SOT323-3L_STM -12.25,75.75 r270 top
U5_B1 "INA228AIDGSR" FP-DGS0010A-IPC_C 26,95.5 r180 top (schematic designator U5)
U5_B2 "INA228AIDGSR" FP-DGS0010A-IPC_C 48,95.5 r180 top (schematic designator U5)
U5_B3 "INA228AIDGSR" FP-DGS0010A-IPC_C 70,95.5 r180 top (schematic designator U5)
U5_B4 "INA228AIDGSR" FP-DGS0010A-IPC_C 92,95.5 r180 top (schematic designator U5)
U5_B5 "INA228AIDGSR" FP-DGS0010A-IPC_C 114,95.5 r180 top (schematic designator U5)
U6_B1 "INA228AIDGSR" FP-DGS0010A-IPC_C 24,37.25 r180 top (schematic designator U6)
U6_B2 "INA228AIDGSR" FP-DGS0010A-IPC_C 46,37.25 r180 top (schematic designator U6)
U6_B3 "INA228AIDGSR" FP-DGS0010A-IPC_C 68,37.25 r180 top (schematic designator U6)
U6_B4 "INA228AIDGSR" FP-DGS0010A-IPC_C 90,37.25 r180 top (schematic designator U6)
U6_B5 "INA228AIDGSR" FP-DGS0010A-IPC_C 112,37.25 r180 top (schematic designator U6)
U7_B1 "LMG2100R026VBNR" VBN0018A-MFG 20.25,72 r90 top (schematic designator U7)
U7_B2 "LMG2100R026VBNR" VBN0018A-MFG 42.25,72 r90 top (schematic designator U7)
U7_B3 "LMG2100R026VBNR" VBN0018A-MFG 64.25,72 r90 top (schematic designator U7)
U7_B4 "LMG2100R026VBNR" VBN0018A-MFG 86.25,72 r90 top (schematic designator U7)
U7_B5 "LMG2100R026VBNR" VBN0018A-MFG 108.25,72 r90 top (schematic designator U7)
U8 "ST1L05CPU33R" DFN6D_L -13.75,47.5 r180 top
U9 "LM74700QDBVRQ1" FP-DBV0006A-IPC_B 107.5,150 r270 top
U10 "TCAN1044DRBRQ1" SON_4DRBRQ1_TEX -16,60 r0 top
U11 "ESDCAN05-2BWY" SOT323-3L_STM -12,60 r270 top
U12 "ST1L05CPU33R" DFN6D_L -13,66.75 r0 top
U13 "LMR51625XDDCR" DDC0006A-MFG -26.636,80.512 r270 top
U14 "CP2102N-A02-GQFN24R" FP-CP2102N-A02-GQFN24R-IPC_C -6.95,100.1 r270 top
U15 "LM74502DDFR" DDF0008A-IPC_A 107.25,120 r270 top
U16_B1 "INA310A2IDGKR" VSSOP8_DGK_TEX 24,33.75 r180 top (schematic designator U16)
U16_B2 "INA310A2IDGKR" VSSOP8_DGK_TEX 46,33.75 r180 top (schematic designator U16)
U16_B3 "INA310A2IDGKR" VSSOP8_DGK_TEX 68,33.75 r180 top (schematic designator U16)
U16_B4 "INA310A2IDGKR" VSSOP8_DGK_TEX 90,33.75 r180 top (schematic designator U16)
U16_B5 "INA310A2IDGKR" VSSOP8_DGK_TEX 112,33.75 r180 top (schematic designator U16)
U17 "TLV3012AIDBVR" FP-DBV0006A-IPC_B -2.5,48 r90 top
Y1 "X50328MSB2GI" RESC5032X135N -19.75,87.75 r180 top
Y2 "X50328MSB2GI" RESC5032X135N -23.25,3 r135 top

## Footprints (in the part's own frame and the unit in brackets; to place one, negate y for a bottom-side part, rotate by r counter-clockwise, add the part's x,y. Pads: shape width x height; smd on the part's side, far side on the other; paste and mask are expansions set on the pad)
5.0SMDJSeries_LTF [mil]
  rect 86x126 smd paste+0 mask+0: 1(-123,0) 2(123,0)
  Keep-Out Layer region: -70.87,-65 -70.87,65 70.87,65 70.87,-65
  silkscreen extent -230,-128 165,128, body extent -160,-123 160,123, height 105
"0805 LED" [mm] "Flat or right angle LED"
  rect 1.2x1.4 smd: A(-0.9,0) K(0.9,0)
  silkscreen extent -2.1,0.8 -1.6,1.3, body extent -0.8,-0.4 0.8,0.4, height 0.56
C0603 [mm] "Capacitor 0603 Footprint"
  rrect30% 0.945x1.05 smd: 1(0.013,0) 2(1.613,0)
  silkscreen extent 0.81,-0.46 0.81,0.46, body extent -0.06,-0.48 1.69,0.48, height 0.95
C0805 [mm] "Capacitor 0805 Footprint"
  rrect30% 1.2x1.55 smd: 1(0,0) 2(1.778,0)
  silkscreen extent 0.89,-0.71 0.89,0.71, body extent -0.09,-0.7 1.91,0.65, height 1.26
CAP_EEE-FK2A220P_PAN [mil]
  rect 134x43 smd paste+0 mask+0: 1(-128,0) 2(128,0)
  silkscreen extent -169,-169 220,169, body extent -191,-163 191,163, height 402
COIL-DO3316P_V [mm] "SMD, 2-Leads, Body 9.4x12.95mm"
  rect 2.92x2.79 smd paste+0: 1(-5.145,0) 2(5.145,0)
  silkscreen extent -6.17,-4.7 6.17,4.7, body extent -6.48,-4.7 6.48,4.7, height 5.21
CONN_BM04B-GHS-TBT_JST [mil]
  rect 26x67 smd paste+0 mask+0: 1(73.82,77.82) 2(24.61,77.82) 3(-24.61,77.82) 4(-73.82,77.82)
  rect 43x114 smd paste+0 mask+0: 5(-146.65,-54.07) 6(146.65,-54.07)
  silkscreen extent -167,-103 168,102, body extent -162,-100 162,95, height 165
DDC0006A-MFG [mm]
  rect 1.1x0.6 smd paste+0 mask+0: 1(-1.35,0.95) 2(-1.35,0) 3(-1.35,-0.95) 4(1.35,-0.95) 5(1.35,0) 6(1.35,0.95)
  silkscreen extent -2.57,-1.53 0.42,1.53, body extent -1.44,-1.45 1.44,1.45, height 0.95
DDF0008A-IPC_A [mm]
  rect 1.757x0.5 smd paste+0 mask+0: 1(-1.151,0.975) 2(-1.151,0.325) 3(-1.151,-0.325) 4(-1.151,-0.975) 5(1.151,-0.975) 6(1.151,-0.325) 7(1.151,0.325) 8(1.151,0.975)
  silkscreen extent -2.73,-1.7 1.4,1.7, body extent -1.41,-1.45 1.41,1.45, height 0.9